# Altium PCB PCB1.PcbDoc (part 1 of 3)
Units mil, origin at the board's own origin, x right, y up, seen from the top; angles counter-clockwise.
Board outline 3930 x 3600 mil, 2 copper layers (Top Layer, Bottom Layer), stack 65.792 mil thick; 169 components, 135 nets, 555 pads, 164 vias.
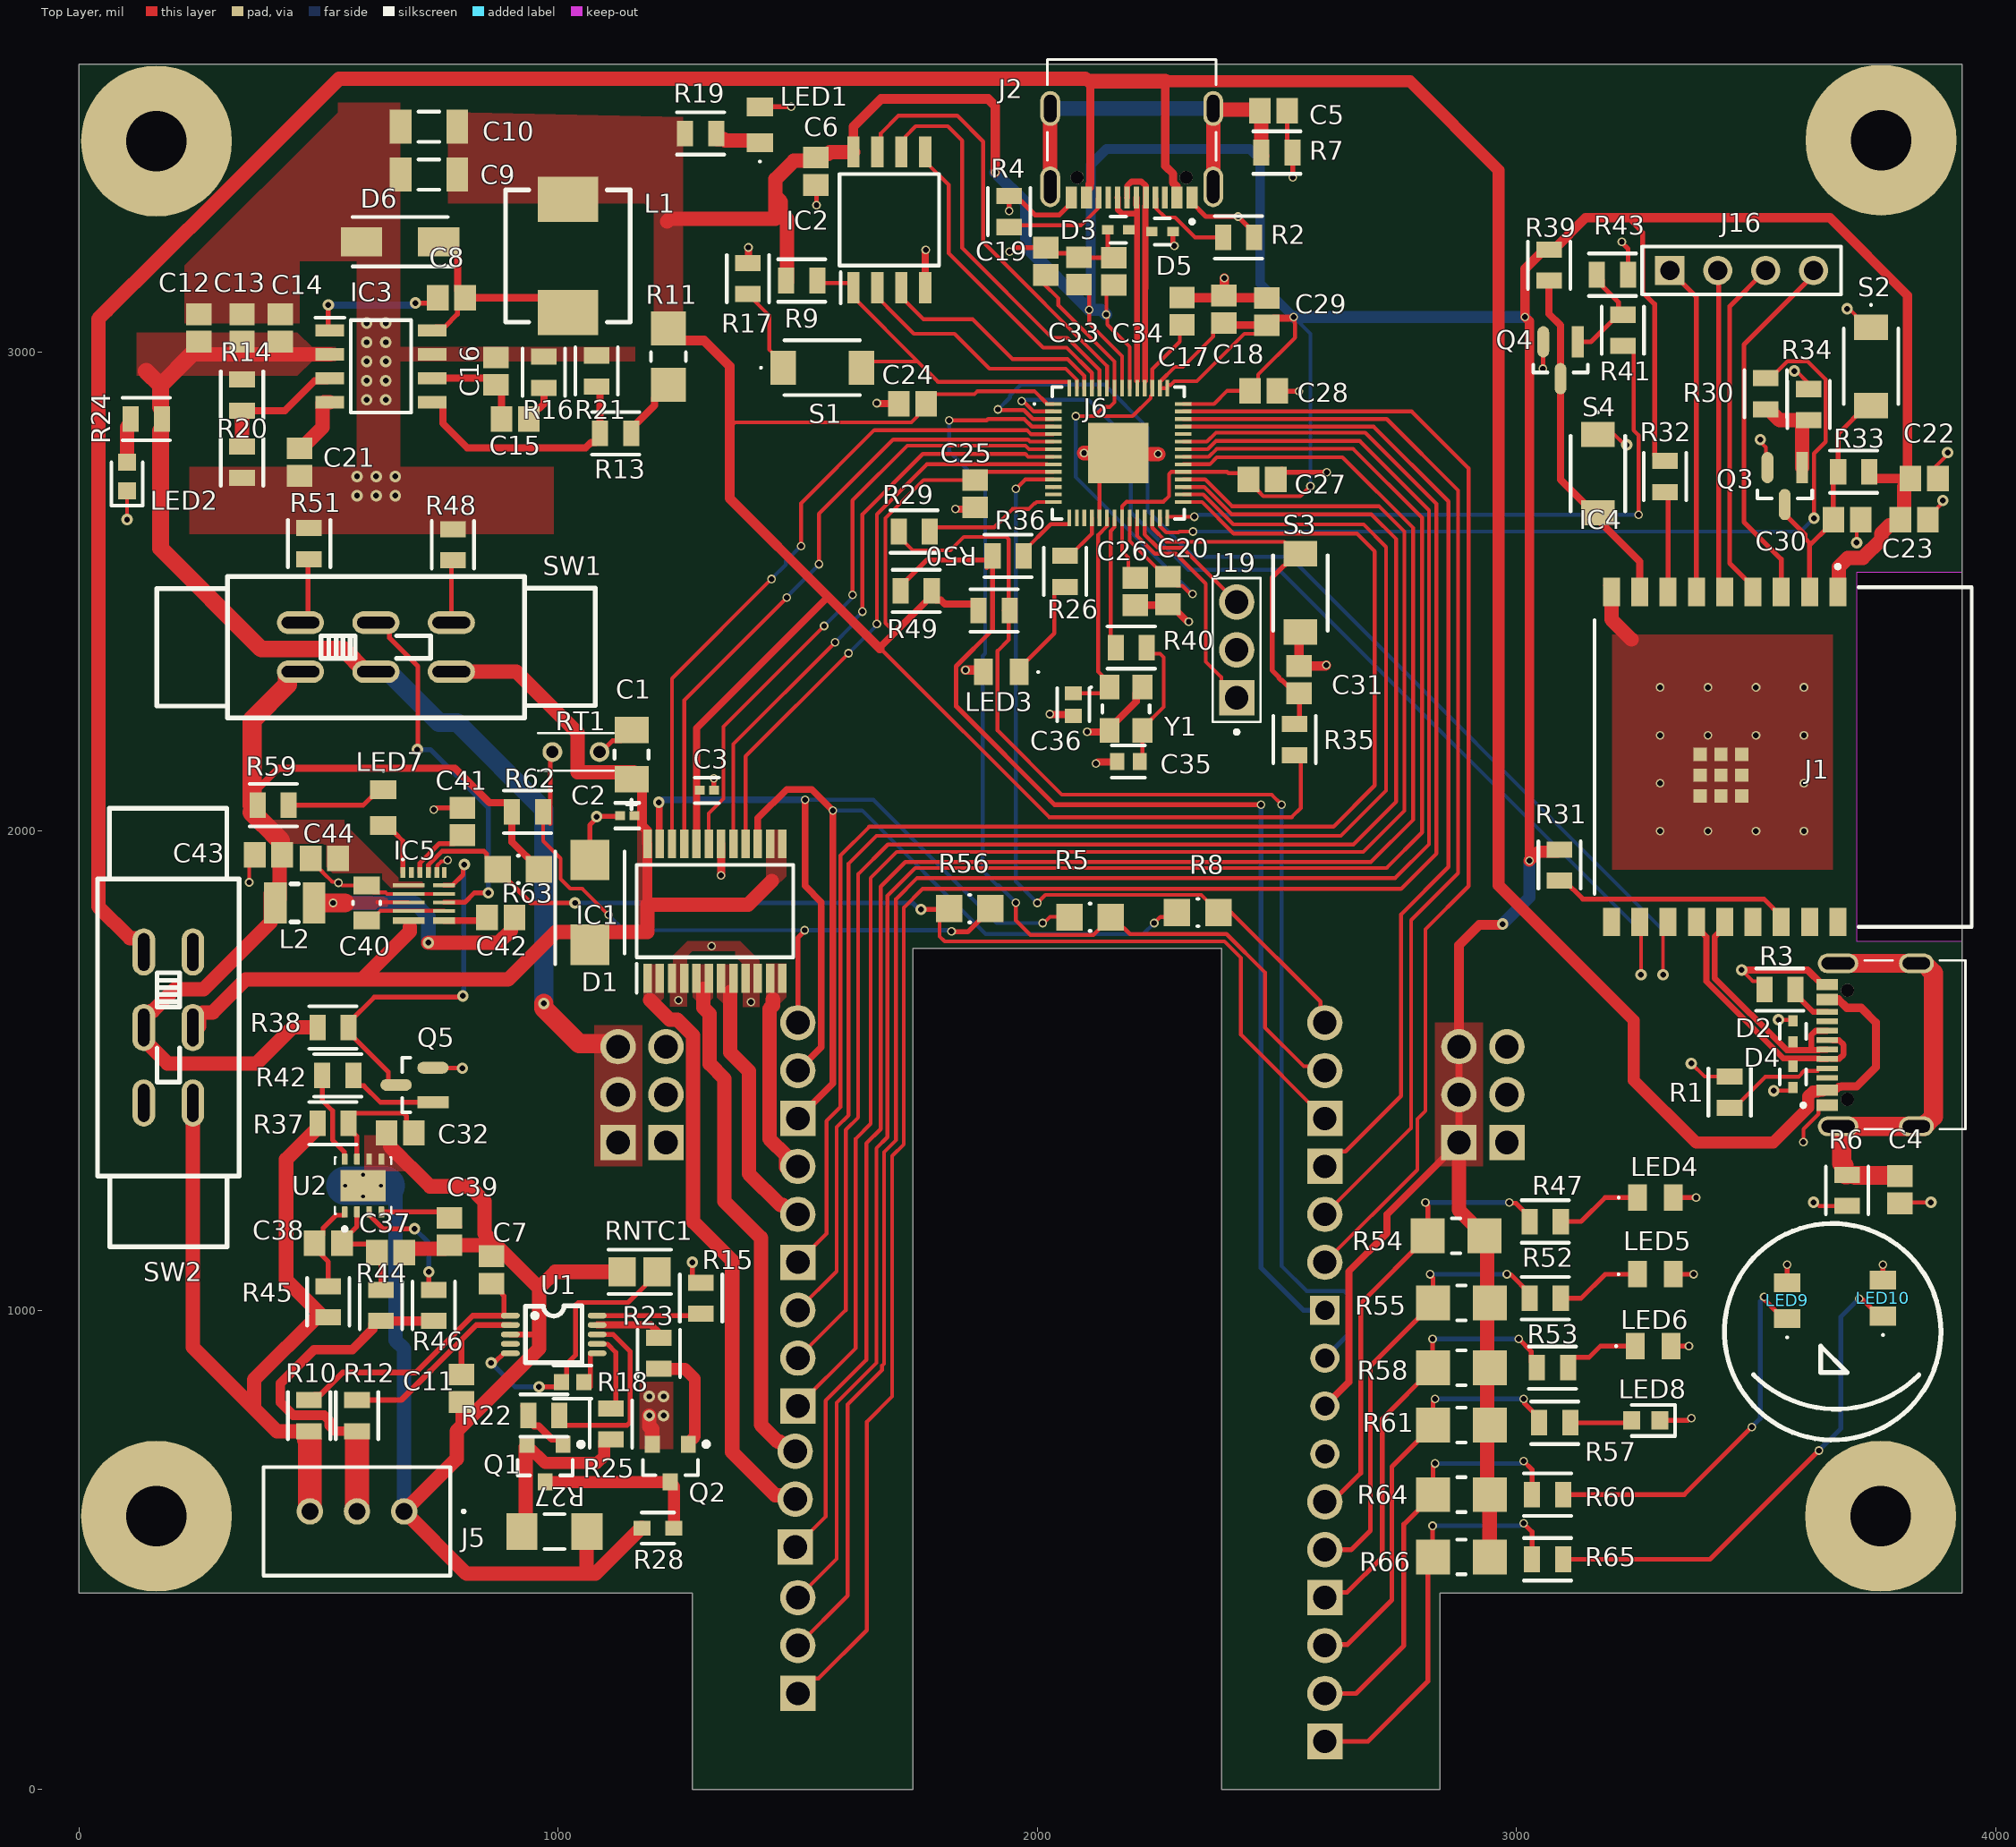
[diagram p0: Top Layer view]
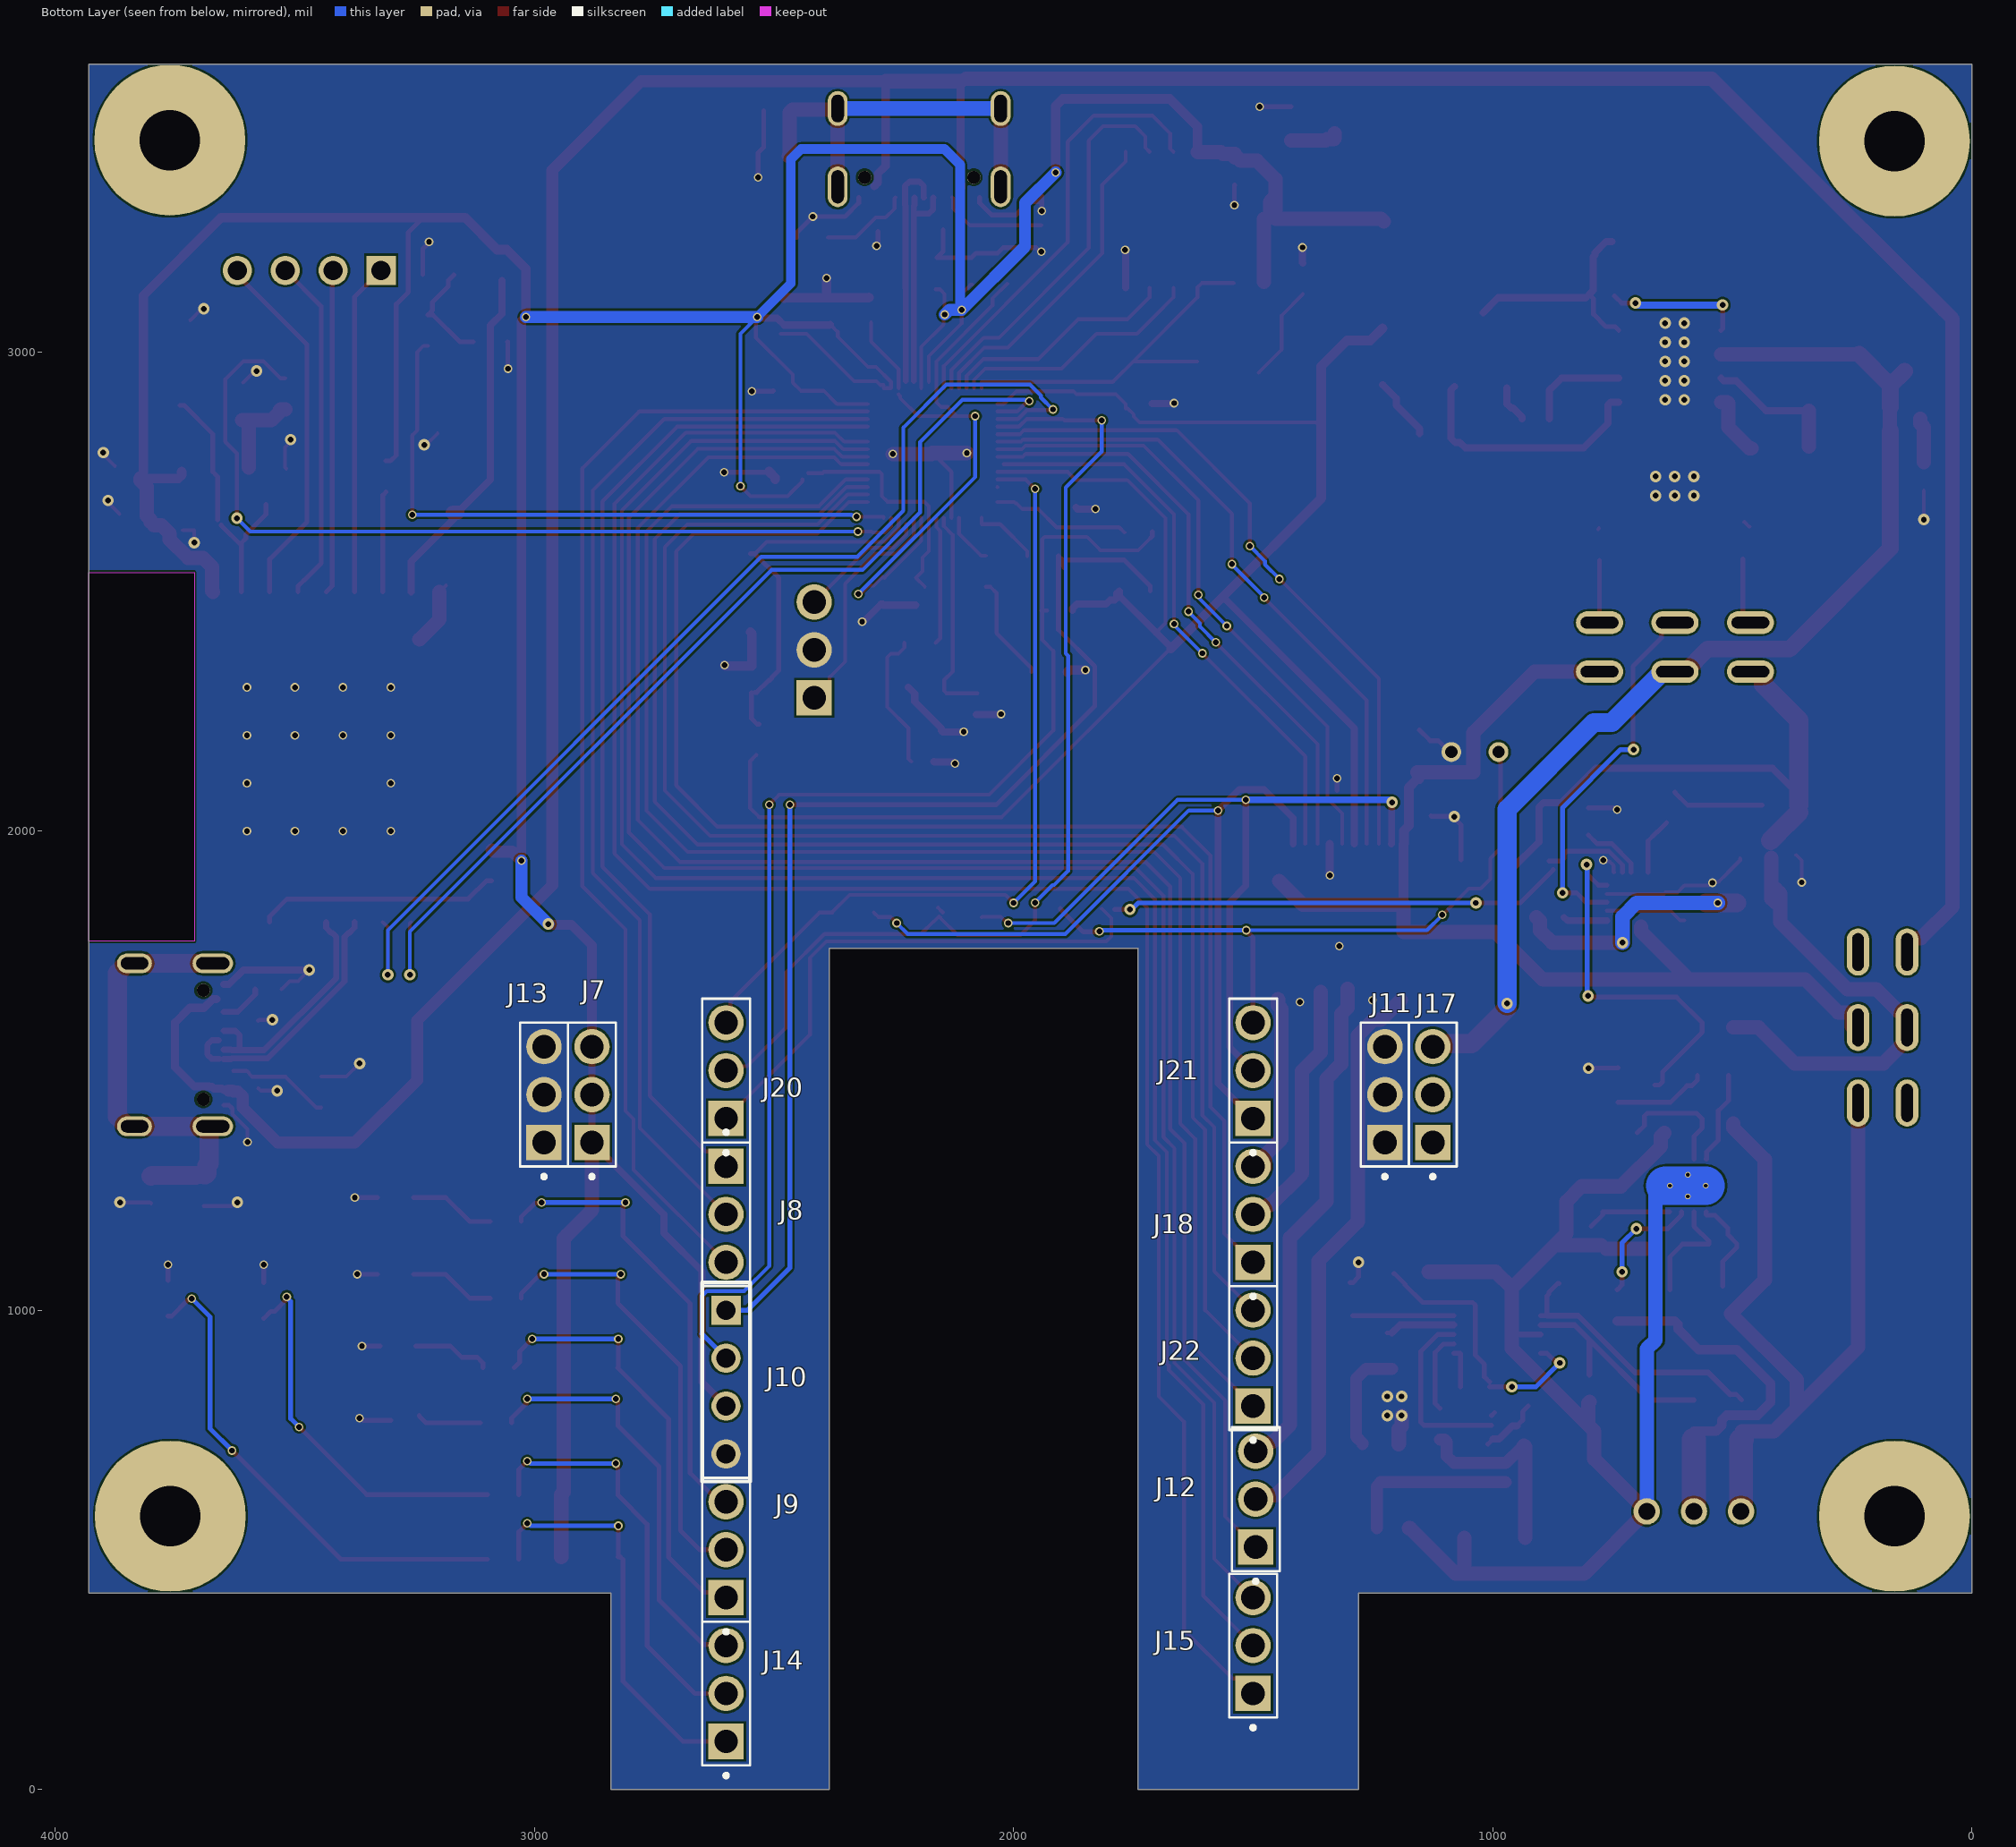
[diagram p1: Bottom Layer view, seen from below]
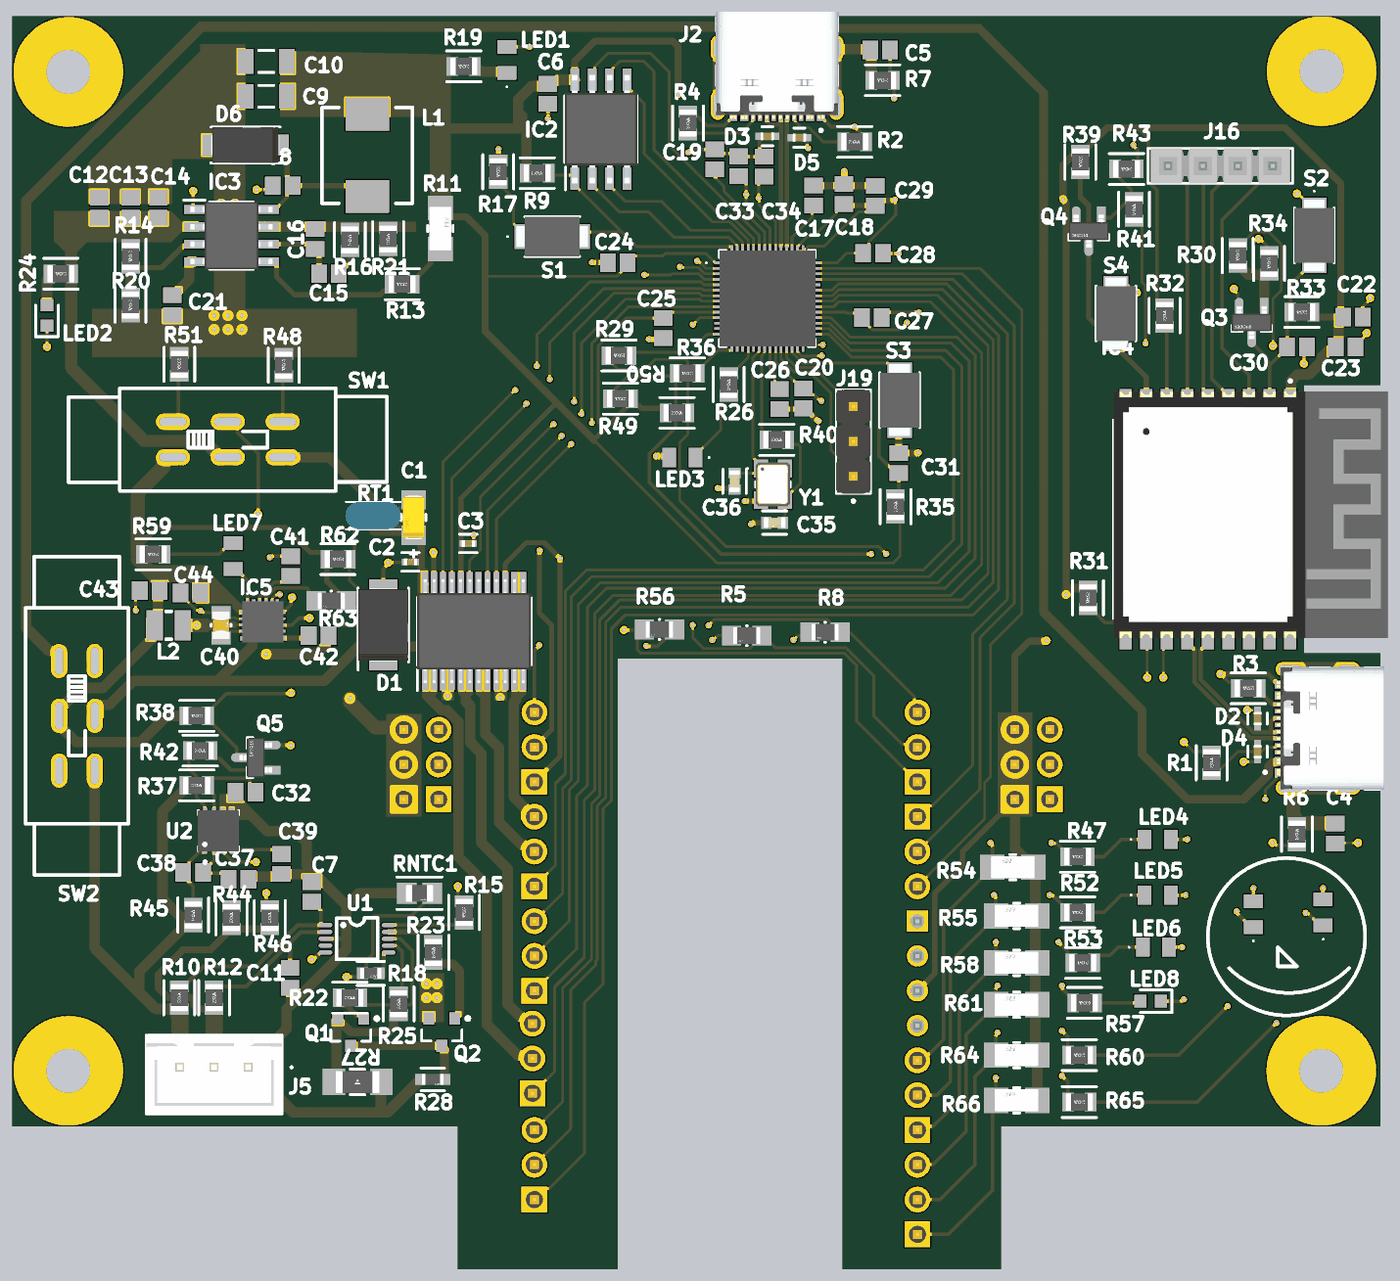
[diagram p3: 3D render of the assembled board from above, using the file's embedded part models]
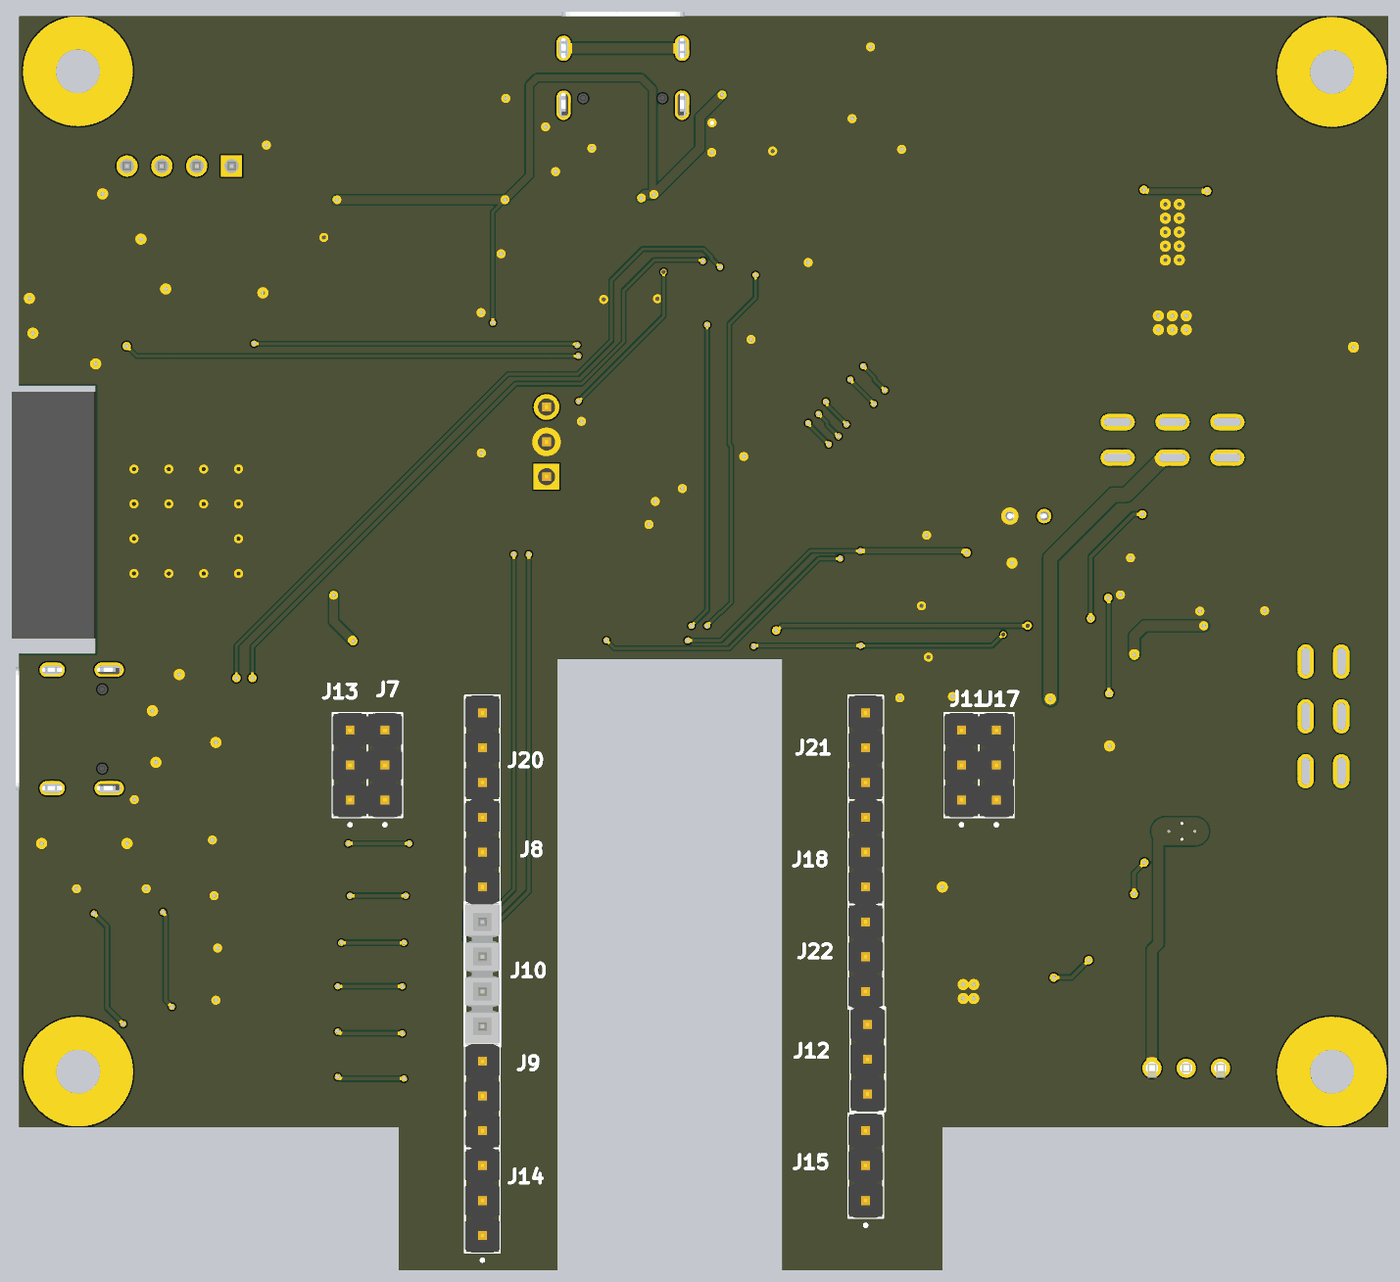
[diagram p4: 3D render of the assembled board from below, using the file's embedded part models]

## Layer stack, top to bottom
Top Solder: solder mask 0.4, Solder Resist, Dk 3.5
Top Layer: signal copper 1.4
Dielectric 1: dielectric 62.9921, FR-4, Dk 4.5
Bottom Layer: signal copper 1.4
Bottom Solder: solder mask 0.4, Solder Resist, Dk 3.5

## Board outline
1280,0 1280,410 0,410 0,3600 3930,3600 3930,410 2840,410 2840,0 2385,0 2385,1755 1740,1755 1740,0
cut-out: 3710,2540 3710,1770 3930,1770 3930,2540

## Design rules (kind name [scope] priority, off if disabled: settings)
Clearance Clearance2 [OnLayer('Power')] p1: gap=10 ignorepadtopadclearanceinfootprint=TRUE
Clearance Clearance_1 [All] p2: gap=4.5 ignorepadtopadclearanceinfootprint=TRUE
DiffPairsRouting [All] p1: maxlimit=5 minlimit=4.5 mostfreqgap=4.5 toplayer_minwidth=12.65 toplayer_maxwidth=14.97 toplayer_prefwidth=12.65 bottomlayer_minwidth=12.65 bottomlayer_maxwidth=14.97 bottomlayer_prefwidth=12.65 maxuncoupledlength=500
HoleSize [All] p1 off: absolutevalues=TRUE maxlimit=100 minlimit=1 maxpercent=80.000 minpercent=20.000
MinimumSolderMaskSliver [All] p1 off: minsoldermaskwidth=10
PolygonConnect [All] p1: connectstyle=Direct reliefconductorwidth=10 reliefentries=4 polygonreliefangle="90 Angle" airgapwidth=10
RoutingVias [All] p1: holewidth=12 width=24 viastyle="Through Hole" minholewidth=12 minwidth=18 maxholewidth=25 maxwidth=50
SilkToSilkClearance [All] p1 off: silktosilkclearance=10
SilkToSolderMaskClearance [IsPad] p1 off: minsilkscreentomaskgap=10 clearancetoexposedcopper=TRUE
SolderMaskExpansion [All] p1: expansion=4 istentingtop=FALSE
SupplyNets "Schematic Supply Nets_15" [InNet('Midtap')] p1: voltage=0.000
SupplyNets "Schematic Supply Nets_14" [InNet('Vin_Buck')] p2: voltage=0.000
SupplyNets "Schematic Supply Nets_13" [InNet('+3V3')] p3: voltage=0.000
SupplyNets "Schematic Supply Nets_12" [InNet('+5_preswitch')] p4: voltage=0.000
SupplyNets "Schematic Supply Nets_11" [InNet('+5_Charging')] p5: voltage=0.000
SupplyNets "Schematic Supply Nets_6" [InNet('Bat+_Preswitch')] p6: voltage=0.000
SupplyNets "Schematic Supply Nets_5" [InNet('Bat+')] p7: voltage=0.000
SupplyNets "Schematic Supply Nets_4" [InNet('1V1')] p8: voltage=0.000
SupplyNets "Schematic Supply Nets_3" [InNet('Bat-')] p9: voltage=0.000
SupplyNets "Schematic Supply Nets_2" [InNet('GND')] p10: voltage=0.000
Width [InNet('+3V3_RF')] p1: maxlimit=14.05 minlimit=14.05 preferedwidth=14.05 minimp=50.000000 maximp=50.000000 favimp=50.000000
Width Width_1 [InNet('NetC47_2')] p2: maxlimit=14.05 minlimit=14.05 preferedwidth=14.05 minimp=50.000000 maximp=50.000000 favimp=50.000000
Width Width2 [InNet('ANT_RF')] p3: maxlimit=14.05 minlimit=14.05 preferedwidth=14.05 minimp=50.000000 maximp=50.000000 favimp=50.000000 // NetC47_2
Width Widthall [All] p4: maxlimit=80 minlimit=4 preferedwidth=15 minimp=50.000000 maximp=50.000000 favimp=50.000000
25 further rules are at their usual default settings.

## Classes and differential pairs
differential pair class USB: ESP_USB_D RP_USB_D
differential pair RP_USB_D: +RP_USB_D_P -RP_USB_D_N
differential pair ESP_USB_D: +ESP_USB_D_P -ESP_USB_D_N

## Components (designator, comment, footprint, x,y, rotation, side; value= is the part's Value field where it differs from the comment)
C1 "10uF" FP-TAJA-MFG 1153,2159.82 r270 top
C2 "0.1uF" FP-CL779-IPC_C 1144,2032 r180 top
C3 "0.1uF" FP-CL779-IPC_C 1310.1,2085 r0 top
C4 "1nF 0805" CAPC2013X94X50LL20T25 3800,1251.46 r90 top
C5 "1nF 0805" CAPC2013X94X50LL20T25 2493,3503 r180 top
C6 "0.1uF" CAPC2013X94X50LL20T25 1538,3377 r270 top
C7 "0.1uF" CAPC2013X94X50LL20T25 861,1084 r90 top
C8 "0.1uF 0805" CAPC2013X94X50LL20T25 777,3113 r180 top
C9 "47uF 1206 (25V)" CAPC1206(3216)190_N 730,3370 r0 top value=47uF
C10 "47uF 1206 (25V)" CAPC1206(3216)190_N 730,3470 r0 top value=47uF
C11 "0.01uF" CAPC2013X94X50LL20T25 798,837 r270 top
C12 "4.7uF 0805" CAPC2013X94X50LL20T25 250,3050 r90 top
C13 "4.7uF 0805" CAPC2013X94X50LL20T25 340,3050 r90 top
C14 "0.01uF" CAPC2013X94X50LL20T25 420,3050 r90 top
C15 "1nF 0805" CAPC2013X94X50LL20T25 910,2860 r0 top
C16 "47pF 0805" CAPC2013X94X50LL20T25 870,2960 r90 top
C17 "1uF" CAPC2013X94X50LL20T25 2302,3085 r90 top
C18 "1uF" CAPC2013X94X50LL20T25 2389,3089 r90 top
C19 "0.1uF" CAPC2013X94X50LL20T25 2018,3189 r90 top
C20 "0.1uF" CAPC2013X94X50LL20T25 2273,2502 r270 top
C21 "0.01uF 0805" CAPC2013X94X50LL20T25 460,2770 r270 top
C22 "22uF" CAPC2013X94X50LL20T25 3851.04,2735.74 r0 top
C23 "0.1uF" CAPC2013X94X50LL20T25 3830,2650 r0 top
C24 "0.1uF" CAPC2013X94X50LL20T25 1739.46,2892 r180 top
C25 "0.1uF" CAPC2013X94X50LL20T25 1870,2704 r270 top
C26 "0.1uF" CAPC2013X94X50LL20T25 2204,2500 r270 top
C27 "0.1uF" CAPC2013X94X50LL20T25 2469,2734 r0 top
C28 "0.1uF" CAPC2013X94X50LL20T25 2472.54,2919 r0 top
C29 "0.1uF" CAPC2013X94X50LL20T25 2479,3084 r90 top
C30 "0.1uF 0805" CAPC2013X94X50LL20T25 3690,2650 r0 top
C31 "0.1uF" CAPC2013X94X50LL20T25 2546,2316 r90 top
C32 "0.1uF 0805" CAPC2013X94X50LL20T25 670,1370 r180 top
C33 "0.1uF" CAPC2013X94X50LL20T25 2087,3169 r90 top
C34 "0.1uF" CAPC2013X94X50LL20T25 2160,3168 r90 top
C35 "18pF 0603" FP-C0603C-CF-MFG 2190,2145 r180 top value="18 pF"
C36 "18pF 0603" FP-C0603C-CF-MFG 2075,2264 r270 top value="18 pF"
C37 "0.1uF 0805" CAPC2013X94X50LL20T25 650,1120 r180 top
C38 "0.1uF 0805" CAPC2013X94X50LL20T25 520,1140 r180 top
C39 "0.33 uF 0805" CAPC2013X94X50LL20T25 773,1164 r270 top
C40 "4.7uF 0805" FP-CC0805-0_85-MFG 600,1850 r90 top value="4.7 uF"
C41 "0.33uF 0805" CAPC2013X94X50LL20T25 800,2020 r90 top
C42 "0.1uF 0805" CAPC2013X94X50LL20T25 880,1820 r0 top
C43 "1uF" CAPC2013X94X50LL20T25 395,1950 r180 top
C44 "4.7uF 0805" CAPC2013X94X50LL20T25 512,1943 r180 top
D1 "15.4V clamp" DIOM5437X260N 1066,1851 r90 top
D2 "ESD Diode" FP-GG0402-MFG 3577,1582 r90 top value=10pF
D3 "ESD Diode" FP-GG0402-MFG 2169,3255 r180 top value=10pF
D4 "ESD Diode" FP-GG0402-MFG 3577,1486.95 r270 top value=10pF
D5 "ESD Diode" FP-GG0402-MFG 2261,3251 r0 top value=10pF
D6 "SS34A" DIOM5026X262N 670,3230 r180 top
IC1 "TB6612FNG_O,C,8,EL" SOP65P760X160-24N 1327,1833 r90 top
IC2 "SPI Flash Memory" SOIC127P790X216-8N 1691,3275.58 r90 top
IC3 "Buck converter" SOIC127P600X175-8N 630,2970 r0 top
IC4 "ESP32-C3-WROOM-02-N4" ESP32C3WROOM02N4 3426.69,2116.69 r270 top
IC5 "Battery Charger" SY6982CQDC 720,1860 r0 top
J1 "USB-C" KINGHELM_KH-TYPE-C-16P 3834.7,1553.78 r90 top
J2 "USB-C" KINGHELM_KH-TYPE-C-16P 2197,3508 r180 top
J5 "JST-XH 2.5mm 3P" B3BXHALFSN 678.43,580 r180 top
J6 "RP2040" SC091413 2169,2789 r0 top
J7 "3V3" WURTH_61300311121 2880,1450 r90 bottom
J8 "ADC" WURTH_61300311121 2600,1200 r270 bottom
J9 "Connect 3V3" WURTH_61300311121 2600,500 r90 bottom
J10 "I2C" SMTC-TSW-104-08-X-S 2600,1000 r270 bottom
J11 "GND" WURTH_61300311121 1225,1450 r90 bottom
J12 "61300311121" WURTH_61300311121 1494.47,605.53 r90 bottom
J13 "GND" WURTH_61300311121 2980,1450 r90 bottom
J14 "Connect 3V3" WURTH_61300311121 2600,200 r90 bottom
J15 "61300311121" WURTH_61300311121 1500,300 r90 bottom
J16 "DNP_JTAG" SMTC-TSW-104-08-X-S 3320,3170 r0 top
J17 "Vin (5V or 7.4V)" WURTH_61300311121 1125,1450 r90 bottom
J18 "61300311121" WURTH_61300311121 1500,1200 r90 bottom
J19 "Debug RP2040" WURTH_61300311121 2416,2378 r90 top
J20 "61300311121" WURTH_61300311121 2600,1500 r90 bottom
J21 "61300311121" WURTH_61300311121 1500,1500 r90 bottom
J22 "61300311121" WURTH_61300311121 1500,900 r90 bottom
L1 "6.8uH" IND-SMD_L7.0-W6.6 1020,3200 r90 top
L2 "0.68uH" IND-SMD_L2.5-W2.0 450,1850 r0 top value=680nH
LED1 "Yellow" KT0805G 1421,3474 r0 top
LED2 "Red" LEDC1608X70N 100,2740 r90 top
LED3 "Green" KT0805G 1925,2332 r90 top
LED4 "White" KT0805G 3290,1235 r270 top
LED5 "Green" KT0805G 3290,1075 r270 top
LED6 "Yellow" KT0805G 3285,925 r270 top
LED7 "Charging" KT0805G 635,2049 r180 top
LED8 "Red" LEDC1608X70N 3270,770 r180 top
LED9 "Green" KT0805G 3565,1020 r0 top
LED10 "Green" KT0805G 3765,1025 r0 top
Q1 "Discharge Protection" ONSC-SOT-23-3-318-08_V 972.6,680.63 r270 top
Q2 "Charge Protection" ONSC-SOT-23-3-318-08_V 1234,681 r270 top
Q3 "MMBT3904-7-F" FP-SOT23-IPC_A 3560,2720 r270 top
Q4 "MMBT3904-7-F" FP-SOT23-IPC_A 3091.98,2982.55 r270 top
Q5 "MMBT3904-7-F" FP-SOT23-IPC_A 700,1470 r180 top
R1 "5.1k 0805" FP-RN73R2A-IPC_C 3445,1455 r90 top
R2 "5.1k 0805" FP-RN73R2A-IPC_C 2420,3239 r0 top
R3 "5.1k 0805" FP-RN73R2A-IPC_C 3550,1669 r180 top
R4 "5.1k 0805" FP-RN73R2A-IPC_C 1941,3293 r90 top
R5 "0ohm 0805" FP-HCJ0805-MFG 2110,1820 r180 top
R6 "1M 0805" FP-RN73R2A-IPC_C 3690,1250 r90 top
R7 "1M 0805" FP-RN73R2A-IPC_C 2500,3416 r180 top
R8 "0ohm 0805" FP-HCJ0805-MFG 2335,1830 r180 top
R9 "10k" FP-RN73R2A-IPC_C 1508,3149 r0 top
R10 "1k 0805" FP-RN73R2A-IPC_C 480,780 r90 top
R11 "0ohm 1206" FP-HCJ1206-MFG 1230,2990 r270 top
R12 "1k 0805" FP-RN73R2A-IPC_C 580,780 r90 top
R13 "10k 0805" FP-RN73R2A-IPC_C 1120,2830 r180 top
R14 "330K 0805" FP-RN73R2A-IPC_C 340,2910 r270 top
R15 "200k" FP-RN73R2A-IPC_C 1298,1025 r270 top
R16 "30K 0805" FP-RN73R2A-IPC_C 970,2957.5 r90 top
R17 "1k 0805" FP-RN73R2A-IPC_C 1396,3153 r270 top
R18 "110K 0603" FP-RMCF0603-IPC_C 1030,850 r0 top
R19 "330 0805" FP-RN73R2A-IPC_C 1297,3456 r180 top
R20 "68K 0805" FP-RN73R2A-IPC_C 340,2770 r270 top
R21 "3.3k 0805" FP-RN73R2A-IPC_C 1080,2960 r90 top
R22 "10k" FP-RN73R2A-IPC_C 970,780 r0 top
R23 "10k" FP-RN73R2A-IPC_C 1210,910 r90 top
R24 "1k 0805" FP-RN73R2A-IPC_C 140,2860 r180 top
R25 "2k" FP-RN73R2A-IPC_C 1110,762.5 r90 top
R26 "330 0805" FP-RN73R2A-IPC_C 2058,2542 r90 top
R27 "40mOhms 1206" FP-WSL1206-0_508-MFG 992,538 r180 top
R28 "3MOhms 0603" FP-AC0603-MFG 1208,545 r0 top
R29 "33 0805" FP-RN73R2A-IPC_C 1743,2625 r180 top
R30 "10k 0805" FP-RN73R2A-IPC_C 3520,2912.5 r270 top
R31 "10k" FP-RN73R2A-IPC_C 3090,1929 r270 top
R32 "10k" FP-RN73R2A-IPC_C 3310,2740 r90 top
R33 "10k" FP-RN73R2A-IPC_C 3703.95,2750 r180 top
R34 "100k 0805" FP-RN73R2A-IPC_C 3610,2890 r270 top
R35 "10k 0805" FP-RN73R2A-IPC_C 2537,2191 r90 top
R36 "33 0805" FP-RN73R2A-IPC_C 1939,2574 r180 top
R37 "100 0805" FP-RN73R2A-IPC_C 530,1390 r0 top
R38 "100k 0805" FP-RN73R2A-IPC_C 530,1590 r180 top
R39 "10k" FP-RN73R2A-IPC_C 3068,3181 r270 top
R40 "1k" FP-RN73R2A-IPC_C 2196,2383 r0 top
R41 "10k 0805" FP-RN73R2A-IPC_C 3222,3045 r90 top
R42 "470K 0805" FP-RN73R2A-IPC_C 540,1490 r0 top
R43 "100k 0805" FP-RN73R2A-IPC_C 3200.5,3161 r180 top
R44 "270 0805" FP-RN73R2A-IPC_C 630,1010 r90 top
R45 "150 0805" FP-RN73R2A-IPC_C 520,1017.5 r90 top
R46 "120 0805 (5% or better)" FP-RN73R2A-IPC_C 740,1010 r90 top
R47 "330 0805" FP-RN73R2A-IPC_C 3060,1185 r180 top
R48 "10k 0805" FP-RN73R2A-IPC_C 780,2597.5 r270 top
R49 "4.7k" FP-RN73R2A-IPC_C 1747,2501 r180 top
R50 "4.7k" FP-RN73R2A-IPC_C 1909.67,2460.33 r0 top
R51 "20k 0805" FP-RN73R2A-IPC_C 480,2600 r270 top
R52 "330 0805" FP-RN73R2A-IPC_C 3060,1025 r180 top
R53 "330 0805" FP-RN73R2A-IPC_C 3075,880 r180 top
R54 "0ohm" FP-HCJ1206-MFG 2874.06,1155 r0 top
R55 "0ohm" FP-HCJ1206-MFG 2885,1015 r0 top
R56 "0ohm 0805" FP-HCJ0805-MFG 1859,1838 r180 top
R57 "330 0805" FP-RN73R2A-IPC_C 3080,765 r180 top
R58 "0ohm" FP-HCJ1206-MFG 2885,880 r0 top
R59 "1k 0805" FP-RN73R2A-IPC_C 405,2054 r180 top
R60 "330 0805" FP-RN73R2A-IPC_C 3065,615 r180 top
R61 "0ohm" FP-HCJ1206-MFG 2885,760 r0 top
R62 "10k 0805" FP-RN73R2A-IPC_C 936,2040 r180 top
R63 "0ohm 0805" FP-HCJ0805-MFG 916.69,1920 r180 top
R64 "0ohm" FP-HCJ1206-MFG 2885,615 r0 top
R65 "330 0805" FP-RN73R2A-IPC_C 3065,480 r180 top
R66 "0ohm" FP-HCJ1206-MFG 2885,485 r0 top
RNTC1 "100KOHM 0805" FP-NCP21-0_2-IPC_A 1170,1080 r0 top
RT1 "NXRT15XH103FA1B030" THERM_NXRT15XH103FA1B030 1037,2165 r180 top
S1 "RP_Boot_Select" TS1088AR02016 1551,2967 r0 top
S2 "ESP_Reset" TS1088AR02016 3740,2970 r270 top
S3 "RP_Reset" TS1088AR02016 2549,2497 r270 top
S4 "ESP_Boot_select" TS1088AR02016 3170,2746 r270 top
SW1 "DPDT Switch (fast charging siwtch, select for )" "PCBComponent_1 - duplicate" 629.48,2387.64 r0 top
SW2 "DPDT Switch (fast charging siwtch, select for )" "PCBComponent_1 - duplicate" 190,1580 r270 top
U1 "BMS" "MSOP-10_L3.0-W3.0-P0.50-LS4.9-BL - duplicate" 990.55,949.37 r270 top
U2 "Cell balancing" SON65P300X300X100-9N 592.6,1260 r90 top
Y1 "12Mhz Crystal" ABM8272T3 2185,2255 r270 top

## Footprints (in the part's own frame and the unit in brackets; to place one, negate y for a bottom-side part, rotate by r counter-clockwise, add the part's x,y. Pads: shape width x height; smd on the part's side, far side on the other; paste and mask are expansions set on the pad)
ABM8272T3 [mm]
  rect 1.3x1.05 smd: 1(-1.15,-0.875) 2(1.15,-0.875) 3(1.15,0.875) 4(-1.15,0.875)
  silkscreen extent -1.2,-1.9 0.2,1.25, body extent -1.6,-1.25 1.6,1.25, height 0.75
B3BXHALFSN [mm]
  round 1.4 hole 0.9: 1(0,0) 2(2.5,0) 3(5,0)
  silkscreen extent -3.2,-2.35 7.45,3.4, body extent -2.45,-2.35 7.45,3.4, height 7.09
CAPC1206(3216)190_N [mm] "Chip Capacitor, Body 3.2x1.6mm, Height 1.9mm, IPC Medium Density"
  rect 1.15x1.8 smd: 1(-1.5,0) 2(1.5,0)
  silkscreen extent -0.55,-0.8 0.55,0.8, body extent -1.7,-0.9 1.7,0.9, height 1.9
CAPC2013X94X50LL20T25 [mm] "Chip Capacitor, 2-Leads, Body 2.01x1.25mm, IPC High Density"
  rect 1.15x1.35 smd: 1(-0.725,0) 2(0.725,0)
  body extent -1.1,-0.72 1.1,0.72, height 0.94
DIOM5026X262N [mm]
  rect 2.2x1.55 smd: 1(-2.05,0) 2(2.05,0)
  silkscreen extent -2.83,-1.31 2.52,1.31, body extent -2.52,-1.31 2.52,1.31, height 2.62
DIOM5437X260N [mm]
  rect 2.15x2.05 smd: 1(-2.25,0) 2(2.25,0)
  silkscreen extent -3.27,-1.84 2.7,1.84, body extent -2.7,-1.84 2.7,1.84, height 2.6
ESP32C3WROOM02N4 [mm]
  rect 1.5x0.9 smd: 1(-9.71,6.2) 2(-9.71,4.7) 3(-9.71,3.2) 4(-9.71,1.7) 5(-9.71,0.2) 6(-9.71,-1.3) 7(-9.71,-2.8) 8(-9.71,-4.3) 9(-9.71,-5.8) 10(7.79,-5.8) 11(7.79,-4.3) 12(7.79,-2.8) 13(7.79,-1.3) 14(7.79,0.2) 15(7.79,1.7) 16(7.79,3.2) 17(7.79,4.7) 18(7.79,6.2)
  rect 0.7x0.7 smd: 19(0,0) 20(1.1,0) 21(1.1,1.1) 22(0,1.1) 23(-1.1,1.1) 24(-1.1,0) 25(-1.1,-1.1) 26(0,-1.1) 27(1.1,-1.1)
  silkscreen extent -11.16,-6.7 8.04,13.3, body extent -10.31,-6.7 7.69,13.3, height 3.2
FP-AC0603-MFG [mm]
  rect 0.9x0.8 smd paste+0 mask+0: 1(-0.85,0) 2(0.85,0)
  silkscreen extent -0.85,-0.82 0.85,0.82, body extent -1.4,-0.55 1.4,0.55, height 0.25
FP-C0603C-CF-MFG [mm]
  rect 0.75x0.9 smd paste+0 mask+0: 1(-0.6,0) 2(0.6,0)
  silkscreen extent -0.87,-0.85 0.88,0.85, body extent -1.2,-0.6 1.2,0.6, height 0.25
FP-CC0805-0_85-MFG [mm]
  rect 0.95x1.4 smd paste+0 mask+0: 1(-0.925,0) 2(0.925,0)
  silkscreen extent -0.08,-0.72 0.08,0.72, body extent -1.6,-1.05 1.6,1.05, height 0.25
FP-CL779-IPC_C [mil]
  rect 20.29x18.6 smd paste+0 mask+0: 1(-14.9,0) 2(14.9,0)
  silkscreen extent -25,-27 25,27, body extent -29,-15 29,15, height 10
FP-GG0402-MFG [mm]
  rect 0.61x0.51 smd paste+0 mask+0: 1(-0.56,0) 2(0.56,0)
  silkscreen extent -0.4,-0.7 0.4,0.7, body extent -0.96,-0.43 0.96,0.43, height 0.25
FP-HCJ0805-MFG [mm]
  rect 1.4x1.44 smd paste+0 mask+0: 1(-1.1,0) 2(1.1,0)
  silkscreen extent -0.03,-0.72 0.03,0.72, body extent -1.9,-0.82 1.9,0.82, height 0.25
FP-HCJ1206-MFG [mm]
  rect 1.8x1.84 smd paste+0 mask+0: 1(-1.5,0) 2(1.5,0)
  silkscreen extent -0.23,-0.92 0.23,0.92, body extent -2.5,-1.02 2.5,1.02, height 0.25
FP-NCP21-0_2-IPC_A [mil]
  rect 57.27x61.27 smd paste+0 mask+0: 1(-36.45,0) 2(36.45,0)
  silkscreen extent -65,-46 65,46, body extent -85,-50 85,50, height 10
FP-RMCF0603-IPC_C [mil]
  rect 31.73x33.79 smd paste+0 mask+0: 1(-23.66,0) 2(23.66,0)
  silkscreen extent -40,-34 40,34, body extent -43,-23 43,23, height 10
FP-RN73R2A-IPC_C [mil]
  rect 33.67x53.39 smd paste+0 mask+0: 1(-32.5,0) 2(32.5,0)
  silkscreen extent -49,-44 49,44, body extent -53,-32 53,32, height 10
FP-SOT23-IPC_A [mm]
  rect 1.659x0.627 smd paste+0 mask+0: 1(-0.977,0.915)
  rrect100% 1.659x0.627 smd paste+0 mask+0: 2(-0.977,-0.915) 3(0.977,0)
  silkscreen extent 0.23,-1.45 0.65,1.45, body extent -2.31,-1.95 2.31,1.95, height 0.25
FP-TAJA-MFG [mm]
  rect 1.4x1.8 smd paste+0 mask+0: 1(-1.3,0) 2(1.3,0)
  silkscreen extent -0.23,-0.9 2.9,0.9, body extent -2.1,-1 2.1,1, height 0.25
FP-WSL1206-0_508-MFG [mm]
  rect 1.65x1.93 smd paste+0 mask+0: 1(-1.725,0) 2(1.725,0)
  silkscreen extent -0.53,-0.93 0.53,0.93, body extent -2.65,-1.06 2.65,1.06, height 0.25
IND-SMD_L2.5-W2.0 [mm]
  rect 1.2x2.2 smd: 1(1.028,0) 2(-1.028,0)
  silkscreen extent -0.2,-1.02 0.2,1.02
IND-SMD_L7.0-W6.6 [mm]
  rect 2.4x3.2 smd: 1(-3,0) 2(3,0)
  silkscreen extent -3.5,-3.3 3.5,3.3
KINGHELM_KH-TYPE-C-16P [mm]
  rect 0.6x1.15 smd: A1_B12(-3.2,4.725) A4_B9(-2.4,4.725) A9_B4(2.4,4.725) A12_B1(3.2,4.725)
  rect 0.3x1.15 smd: A5(-1.25,4.725) A6(-0.25,4.725) A7(0.25,4.725) A8(1.25,4.725) B5(1.75,4.725) B6(0.75,4.725) B7(-0.75,4.725) B8(-1.75,4.725)
  oval 1.05x1.85 hole 0.65 slot 1.45 at 90 deg: SH1(-4.32,0) SH2(4.32,0)
  oval 1.05x2.15 hole 0.65 slot 1.75 at 90 deg: SH3(-4.32,4.15) SH4(4.32,4.15)
  round 0.7 hole 0.7 unplated: ""(-2.89,3.65) ""(2.89,3.65)
  silkscreen extent -4.47,-2.6 4.47,6.1, body extent -4.47,-2.67 4.47,5.14, height 3.41
KT0805G [mm]
  rect 1.4x1 smd: 1(0,-0.95) 2(0,0.95)
  silkscreen extent -0.05,-2 0.05,-1.9
LEDC1608X70N [mm]
  rect 0.9x0.95 smd: 1(-0.75,0) 2(0.75,0)
  silkscreen extent -1.55,-0.82 0.75,0.82
"MSOP-10_L3.0-W3.0-P0.50-LS4.9-BL - duplicate" [mm]
  oval 0.3x1 smd: 1(-1,-2.3) 2(-0.5,-2.3) 3(0,-2.3) 4(0.5,-2.3) 5(1,-2.3) 6(1,2.3) 7(0.5,2.3) 8(0,2.3) 9(-0.5,2.3) 10(-1,2.3)
  silkscreen extent -1.52,-1.5 1.5,1.5
ONSC-SOT-23-3-318-08_V [mm] "SOT23, 3-Leads, Body 2.92x1.3mm, Pitch 0.95mm"
  rect 0.9x0.8 smd: 1(-1,0.95) 2(-1,-0.95) 3(1,0)
  silkscreen extent -1.12,-1.46 0.65,2.03, body extent -0.65,-1.46 0.65,1.46, height 1.11
"PCBComponent_1 - duplicate" [mm]
  oval 2.5x1.2 hole 0.6 slot 2 at 0 deg paste-2539.97 mask+0.05: 1(-4.254,1.203) 2(-0.254,1.203) 3(3.746,1.203) 4(-4.254,-1.397) 5(-0.254,-1.397) 6(3.746,-1.397)
  silkscreen extent -11.87,-3.85 11.37,3.65
SC091413 [mm]
  rect 0.875x0.2 smd: 1(-3.438,2.6) 2(-3.438,2.2) 3(-3.438,1.8) 4(-3.438,1.4) 5(-3.438,1) 6(-3.438,0.6) 7(-3.438,0.2) 8(-3.438,-0.2) 9(-3.438,-0.6) 10(-3.438,-1) 11(-3.438,-1.4) 12(-3.438,-1.8) 13(-3.438,-2.2) 14(-3.438,-2.6) 29(3.438,-2.6) 30(3.438,-2.2) 31(3.438,-1.8) 32(3.438,-1.4) 33(3.438,-1) 34(3.438,-0.6) 35(3.438,-0.2) 36(3.438,0.2) 37(3.438,0.6) 38(3.438,1) 39(3.438,1.4) 40(3.438,1.8) 41(3.438,2.2) 42(3.438,2.6)
  rect 0.2x0.875 smd: 15(-2.6,-3.438) 16(-2.2,-3.438) 17(-1.8,-3.438) 18(-1.4,-3.438) 19(-1,-3.438) 20(-0.6,-3.438) 21(-0.2,-3.438) 22(0.2,-3.438) 23(0.6,-3.438) 24(1,-3.438) 25(1.4,-3.438) 26(1.8,-3.438) 27(2.2,-3.438) 28(2.6,-3.438) 43(2.6,3.438) 44(2.2,3.438) 45(1.8,3.438) 46(1.4,3.438) 47(1,3.438) 48(0.6,3.438) 49(0.2,3.438) 50(-0.2,3.438) 51(-0.6,3.438) 52(-1,3.438) 53(-1.4,3.438) 54(-1.8,3.438) 55(-2.2,3.438) 56(-2.6,3.438)
  rect 3.2x3.2 smd: 57(0,0)
  silkscreen extent -4.5,-3.5 3.5,3.5, body extent -3.5,-3.5 3.5,3.5, height 0.92
SMTC-TSW-104-08-X-S [mm] ".025 SQ Post Terminal Strip Assembly, 1x4 Pins, Vertical, 2.54mm Pitch, Male"
  rect 1.55x1.55 hole 1.02: 1(0,0)
  round 1.55 hole 1.02: 2(2.54,0) 3(5.08,0) 4(7.62,0)
  silkscreen extent -1.46,-1.27 9.08,1.27, body extent -1.27,-1.27 8.89,1.27, height 8.38
SOIC127P600X175-8N [mm]
  rect 1.525x0.65 smd: 1(-2.712,1.905) 2(-2.712,0.635) 3(-2.712,-0.635) 4(-2.712,-1.905) 5(2.712,-1.905) 6(2.712,-0.635) 7(2.712,0.635) 8(2.712,1.905)
  silkscreen extent -3.47,-2.45 1.6,2.58, body extent -3,-2.45 3,2.45, height 1.75
SOIC127P790X216-8N [mm]
  rect 1.65x0.65 smd: 1(-3.6,1.905) 2(-3.6,0.635) 3(-3.6,-0.635) 4(-3.6,-1.905) 5(3.6,-1.905) 6(3.6,-0.635) 7(3.6,0.635) 8(3.6,1.905)
  silkscreen extent -4.43,-2.64 2.42,2.64, body extent -3.95,-2.64 3.95,2.64, height 2.16
SON65P300X300X100-9N [mm]
  rrect25% 0.6x0.3 smd mask+0: 1(-1.4,0.975) 2(-1.4,0.325) 3(-1.4,-0.325) 4(-1.4,-0.975) 5(1.4,-0.975) 6(1.4,-0.325) 7(1.4,0.325) 8(1.4,0.975)
  rect 1.65x2.4 smd paste-2 mask+0.07: 9(0,0)
  round 0.3 hole 0.2 mask+0: 10(0,0.95) 11(-0.575,0) 12(0.575,0) 13(0,-0.95)
  silkscreen extent -2.4,-1.5 1.5,1.5, body extent -1.5,-1.5 1.5,1.5, height 1
SOP65P760X160-24N [mm]
  rect 1.525x0.45 smd: 1(-3.562,3.575) 2(-3.562,2.925) 3(-3.562,2.275) 4(-3.562,1.625) 5(-3.562,0.975) 6(-3.562,0.325) 7(-3.562,-0.325) 8(-3.562,-0.975) 9(-3.562,-1.625) 10(-3.562,-2.275) 11(-3.562,-2.925) 12(-3.562,-3.575) 13(3.562,-3.575) 14(3.562,-2.925) 15(3.562,-2.275) 16(3.562,-1.625) 17(3.562,-0.975) 18(3.562,-0.325) 19(3.562,0.325) 20(3.562,0.975) 21(3.562,1.625) 22(3.562,2.275) 23(3.562,2.925) 24(3.562,3.575)
  silkscreen extent -4.33,-4.15 2.45,4.15, body extent -3.8,-4.15 3.8,4.15, height 1.6
SY6982CQDC [mm]
  rect 0.25x0.575 smd: 1(-1.125,1.363) 2(-0.675,1.363) 3(-0.225,1.363) 4(0.225,1.363) 5(0.675,1.363) 6(1.065,1.363)
  rect 1.17x0.225 smd: 7(1.065,0.688)
  rect 1.17x0.2 smd: 8(1.065,0.225) 9(1.065,-0.225) 10(1.065,-0.675)
  rect 1.17x0.35 smd: 11(1.065,-1.2)
  rect 1.68x0.35 smd: 12(-0.81,-1.2)
  rect 1.68x0.2 smd: 13(-0.81,-0.675) 14(-0.81,-0.225) 15(-0.81,0.225)
  rect 1.68x0.225 smd: 16(-0.81,0.688)
  silkscreen extent -1.17,2 -1.08,2.1, body extent -1.5,-1.5 1.5,1.5, height 1
THERM_NXRT15XH103FA1B030 [mm]
  round 1.05 hole 0.65: 1(-1.25,0) 2(1.25,0)
  silkscreen extent -2,-1 2,1, body extent -2,-1 2,1, height 7.49
TS1088AR02016 [mm]
  rect 1.35x1.8 smd: 1(-2.075,0) 2(2.075,0)
  silkscreen extent -3.3,-1.45 2,1.45, body extent -2.62,-1.45 2.62,1.45, height 2.1
WURTH_61300311121 [mm]
  rect 1.875x1.875 / inner round 1.875 / far side rect 1.875x1.875 hole 1.25: 1(-2.54,0)
  round 1.875 hole 1.25: 2(0,0) 3(2.54,0)
  silkscreen extent -4.45,-1.27 3.81,1.27, body extent -3.81,-1.27 3.81,1.27, height 7.27

## Part data
C1: library part CMP-1661-00004-2, "C7171", Case Code (Imperial)=1206, Case Code (Metric)=3216, Dielectric Material=Tantalum, ESR (Equivalent Series Resistance)=3R, Leakage Current=1.6uA, Max Operating Temperature=125°C, Min Operating Temperature=-55°C, Package Quantity=1, Tolerance=10%, Voltage=16V, Capacitance=10uF, Case/Package=1206, Depth=1.6mm, Dissipation Factor=8%, Features="General Purpose", Height=1.6mm, Height - Seated (Max)=0.071inch, LCSC=C7171, Lead Free="Lead Free", Lead Pitch=1.1mm, Length=3.2mm, Mount="Surface Mount", Number of Pins=2, Packaging="Tape and Reel", Polarity=Polar, Radiation Hardening=No, REACH SVHC="No SVHC", Termination=SMD/SMT, Voltage Rating=16V, Voltage Rating (DC)=16V, Width=1.6mm
C2 C3: library part CMP-13271-002336-1, "C307331", LCSC=C307331
C4 C5 C15: library part CMP-2007-04160-1, "C46653", Manufacturer="AVX Interconnect / Elco", Part Number=08051C102KAT4A
C6 C7 C8 C19 C20 C23 C24 C25 C26 C27 C28 C29 C30 C31 C32 C33 C34 C37 C38 C42: library part CMP-2007-04160-1, "C28233", Manufacturer="AVX Interconnect / Elco", Part Number=08051C102KAT4A
C9 C10: library part CMP-1037-05002-1, "C6119973", Case-EIA=1206, Case-Metric=3216, Rated Voltage="10 V", Tolerance=Â±20%, Max Thickness="1.9 mm", Technology=SMT
C11 C14 C21: library part CMP-2007-04160-1, "C1710", Manufacturer="AVX Interconnect / Elco", Part Number=08051C102KAT4A
C12 C13 C44: library part CMP-2007-04160-1, "C1779", Manufacturer="AVX Interconnect / Elco", Part Number=08051C102KAT4A
C16: library part CMP-2007-04160-1, "C14857", Manufacturer="AVX Interconnect / Elco", Part Number=08051C102KAT4A
C17: library part CMP-2007-04160-1, "C28323 / Put Close to Pin45", Manufacturer="AVX Interconnect / Elco", Part Number=08051C102KAT4A
C18: library part CMP-2007-04160-1, "C28323 / Put Close to Pin44", Manufacturer="AVX Interconnect / Elco", Part Number=08051C102KAT4A
C22: library part CMP-2007-04160-1, "C45783", Manufacturer="AVX Interconnect / Elco", Part Number=08051C102KAT4A
C35 C36: library part CMP-03020-027993-1, "C1647", Capacitance="18 pF", Manufacturer=KEMET, Manufacturer Part Number=C0603C180K4HACTU, Package=C0603C-CF, Temperature="-55°C to +125°C", Temperature Characteristic=X8R, Temperature Coefficient=30ppm/°C, Temperature Range High=+125°C, Temperature Range Low=-55°C, Tolerance=0.1, Voltage Rating="16 V", Automotive=Yes, Automotive Grade="Grade 1", Category=Cap, ComponentLink2Description=Datasheet, ComponentLink2URL=https://api.kemet.com/component-edge/download/datasheet/C0603C100J5GACAUTO.pdf, Device Class L1="Passive Components", Device Class L2=Capacitors, Device Class L3="Ceramic Capacitors", Height=0.87mm, Lead Free=Yes, Material=Ceramic, Octopart=https://octopart.com/c0603c180k4hactu-kemet-88725221, RoHS=TRUE
C39 C41: library part CMP-2007-04160-1, "C1740", Manufacturer="AVX Interconnect / Elco", Part Number=08051C102KAT4A
C40: library part CMP-03422-000966-1, "C1779", Capacitance="4.7 uF", Manufacturer=Yageo, Manufacturer Part Number=CC0805KKX5R9BB475, Package=CC0805-0.85, Temperature="-30°C to +85°C", Temperature Characteristic=X5R, Temperature Range High=+85°C, Temperature Range Low=-30°C, Tolerance=0.1, Voltage Rating="50 V", Automotive=No, Category=Cap, ComponentLink2Description=Datasheet, ComponentLink2URL=http://www.yageo.com/documents/recent/UPY-GPHC_Y5V_6.3V-to-50V_8.pdf, Device Class L1="Passive Components", Device Class L2=Capacitors, Device Class L3="Ceramic Capacitors", Digikey Description="CAP CER 4.7UF 50V X5R 0805", Footprint Url=http://www.yageo.com/exep/pages/download/literatures/UPY-C_GEN_24.pdf, Height=0.95mm, Ipc Land Pattern Name=CAPC200125X85, Lead Free=Yes, Material=Ceramic, Octopart=https://octopart.com/cc0805kkx5r9bb475-yageo-81932641, RoHS=TRUE
C43: library part CMP-2007-04160-1, "C28323", Manufacturer="AVX Interconnect / Elco", Part Number=08051C102KAT4A
D1: library part SMBJ9.0A, "C707989", Manufacturer_Name="HY Electronic", Datasheet Link=https://www.hygroup.com.tw/upfiles/ADUpload/all_/SMBJ%20Series%20Rev-3.pdf, Height=2.6mm, Manufacturer_Part_Number=SMBJ9.0A
D2 D3 D4 D5: library part CMP-04587-000001-1, "C10662", Breakdown Voltage=5.5V, Capacitance=10pF, Clamping Voltage=12V, Manufacturer="AVX Corporation", Manufacturer Part Number=GG040205100N2P, Package=GG0402, Peak Pulse Current=16A, Peak Pulse Power=96W, Reverse Standoff Voltage=5V, Temperature="-55°C to +125°C", Temperature Range High=+125°C, Temperature Range Low=-55°C, Automotive=No, Category=Diode, ComponentLink2Description=Datasheet, ComponentLink2URL=http://datasheets.avx.com/AVX-GiGuard.pdf, Device Class L1="Circuit Protection", Device Class L2="TVS Diodes", Device Class L3=unset, Digikey Description="TVS DIODE 5V 12V 0402", Direction=Bidirectional, Height=0.55mm, Ipc Land Pattern Name=DIOC10060X50, Lead Free=Yes, Number Of Channels=1, Octopart=https://octopart.com/gg040205100n2p-avx-81066081, RoHS=TRUE
D6: "C8678", Manufacturer_Name="HY Electronic", Datasheet Link=https://datasheet.datasheetarchive.com/originals/distributors/Datasheets-3/DSA-43252.pdf, Height=2.62mm, Manufacturer_Part_Number=SS34A
IC1: "C88224", Arrow Part Number=TB6612FNG(O,C,8,EL, Manufacturer_Name=Toshiba, Mouser Part Number=757-TB6612FNGOC8EL, Arrow Price/Stock=https://www.arrow.com/en/products/tb6612fng-oc8el/toshiba, Datasheet Link=https://componentsearchengine.com/Datasheets/1/TB6612FNG(O,C,8,EL.pdf, Height=1.6mm, Manufacturer_Part_Number=TB6612FNG(O,C,8,EL, Mouser Price/Stock=http://www.mouser.com/Search/ProductDetail.aspx?qs=VMlqFFbv3sQEQqYF0HJbow%3d%3d
IC2: library part W25Q16JVSSIQ_TR, "C131025", Arrow Part Number="W25Q16JVSSIQ TR", Manufacturer_Name=Winbond, Mouser Part Number=454-W25Q16JVSSIQTR, Arrow Price/Stock=https://www.arrow.com/en/products/w25q16jvssiqtr/winbond-electronics?utm_currency=USD&region=nac, Datasheet Link=https://www.winbond.com/resource-files/w25q16jv%20spi%20revg%2003222018%20plus.pdf, Height=2.16mm, Manufacturer_Part_Number="W25Q16JVSSIQ TR", Mouser Price/Stock=https://www.mouser.co.uk/ProductDetail/Winbond/W25Q16JVSSIQ-TR?qs=qSfuJ%252Bfl%2Fd6oXlsNm7Svfg%3D%3D
IC3: library part TPS54331D, "C9865", Manufacturer_Name="Texas Instruments", Mouser Part Number=595-TPS54331D, Arrow Part Number=TPS54331D, Arrow Price/Stock=https://www.arrow.com/en/products/tps54331d/texas-instruments?utm_currency=USD&region=europe, Datasheet Link=http://www.ti.com/lit/gpn/tps54331, Height=1.75mm, Manufacturer_Part_Number=TPS54331D, Mouser Price/Stock=https://www.mouser.co.uk/ProductDetail/Texas-Instruments/TPS54331D?qs=QyYHynRG50pEbpiybdzwkw%3D%3D
IC4: "C2934560", Manufacturer_Name="Espressif Systems", Mouser Part Number=356-ESP32C3WROOM02N4, Datasheet Link=https://www.mouser.ch/datasheet/2/891/Espressif_ESP32_C3_WROOM_02-2006871.pdf, Height=3.35mm, Manufacturer_Part_Number=ESP32-C3-WROOM-02-N4, Mouser Price/Stock=https://www.mouser.co.uk/ProductDetail/Espressif-Systems/ESP32-C3-WROOM-02-N4?qs=stqOd1AaK7%2FqjTZKEOgfUg%3D%3D
IC5: library part SY6982CQDC, "C7435940", Manufacturer_Name=Silergy, Datasheet Link=https://arvidtek.com/wp-content/uploads/2025/01/2307111037_Silergy-Corp-SY6982CQDC_C7435940.pdf, Height=0.9mm, Manufacturer_Part_Number=SY6982CQDC
J1 J2: library part KH-TYPE-C-16P, "C2765186", Package=None, Check_prices=https://www.snapeda.com/parts/KH-TYPE-C-16P/Kinghelm/view-part/?ref=eda, MF=kinghelm, MP=KH-TYPE-C-16P, SnapEDA_Link=https://www.snapeda.com/parts/KH-TYPE-C-16P/Kinghelm/view-part/?ref=snap
J5: library part B3B-XH-A_LF__SN_, "C144394", Arrow Part Number=B3B-XH-A(LF)(SN), Manufacturer_Name="JST (JAPAN SOLDERLESS TERMINALS)", Mouser Part Number=306-B3BXHALFSNP, Arrow Price/Stock=https://www.arrow.com/en/products/b3b-xh-a-lf-sn/jst-manufacturing?utm_currency=USD&region=europe, Datasheet Link=https://datasheet.lcsc.com/szlcsc/1812131720_JST-Sales-America-B3B-XH-A-LF-SN_C144394.pdf, Height=7mm, Manufacturer_Part_Number=B3B-XH-A(LF)(SN), Mouser Price/Stock=https://www.mouser.co.uk/ProductDetail/JST-Commercial/B3B-XH-ALFSN?qs=cdbOS8ANM9BVkoboCCIEMQ%3D%3D
J6: library part SC0914_13_, "C2040", Manufacturer_Name=RASPBERRY-PI, Manufacturer_Part_Number=SC0914(13), Mouser Part Number=358-SC091413, Datasheet Link=https://datasheets.raspberrypi.com/rp2040/rp2040-datasheet.pdf, Height=0.9mm, Mouser Price/Stock=https://www.mouser.co.uk/ProductDetail/Raspberry-Pi/SC091413?qs=T%252BzbugeAwjhr%252BUbBr3TJcw%3D%3D
J7 J8 J9 J11 J13 J14 J17 J19: library part 61300311121, "C52016391", Package=None, Availability=Unavailable, MP=61300311121, Price=None
J10 J16: library part CMP-1024-00357-1, "0.025\" SQ Post Header, Through-hole, Vertical, -55 to 125 degC, 2.54 mm Pitch, 4-Pin, Male, RoHS", Manufacturer=Samtec, PartNumber=TSW-104-08-G-S, Temperature Range="-55 to 125 degC", ComponentLink1Description="Manufacturer URL", ComponentLink1URL=http://www.samtec.com, ComponentLink2Description=Datasheet, ComponentLink2URL=http://www.samtec.com/documents/webfiles/pdf/TSW_TH.PDF, ComponentLink3Description="Package Specification", ComponentLink3URL=http://www.samtec.com/documents/webfiles/cpdf/TSW-XXX-XX-XXX-X-XX-XXX-MKT.pdf, DatasheetVersion=F-214, Mounting Technology=Through-hole, Orientation=Vertical, PackageDescription=".025[0.64] SQ. Post Terminal Strip Assembly", PackageReference=TSW-104-08-X-S, PackageVersion="DM, 8/1988", Pitch="2.54 mm", RoHS=True
J12 J15 J18 J20 J21 J22: "C52016391", Package=None, Availability=Unavailable, MP=61300311121, Price=None
L1: library part FXL0630-6R8-M, "C167221", Current - Saturation(Isat)=6A, Current Rating=5A, DC Resistance(DCR)=48mΩ, JLCPCB Part Class="Extended Part", LCSC Part Name="6.8uH ±20% 6A", Manufacturer=cjiang(长江微电), Tolerance=±20%, Add into BOM=yes, Convert to PCB=yes, Datasheet=https://item.szlcsc.com/datasheet/FXL0630-6R8-M/178604.html, Device=FXL0630-6R8-M, Manufacturer Part=FXL0630-6R8-M, Supplier=LCSC, Supplier Footprint=SMD,7x6.6mm, Supplier Part=C167221, Symbol=FXL0630-6R8-M, Type="Molded Inductor"
L2: library part 252012CDMCDDS-R68MC, "C492726", Current - Saturation(Isat)=6.3A, Current Rating=-, DC Resistance(DCR)=30mΩ, JLCPCB Part Class="Extended Part", LCSC Part Name="680nH ±20% 6.3A", Manufacturer=Sumida(胜美达), Tolerance=±20%, Add into BOM=yes, Convert to PCB=yes, Datasheet=https://item.szlcsc.com/datasheet/252012CDMCDDS-R68MC/503355.html, Device=252012CDMCDDS-R68MC, Manufacturer Part=252012CDMCDDS-R68MC, Ratings=-, Supplier=LCSC, Supplier Footprint=1008, Supplier Part=C492726, Symbol=252012CDMCDDS-R68MC, Type="Molded Inductor"
LED1 LED6: library part KT-0805G, "C2296", Manufacturer_Name="Hubei KENTO Elec", Datasheet Link=https://jlcpcb.com/api/file/downloadByFileSystemAccessId/8639582106239348736, Height=0.95mm, Manufacturer_Part_Number=KT-0805G
LED2 LED8: library part KT-0603R, "C2286", Manufacturer_Name="Hubei KENTO Elec", Datasheet Link=https://datasheet.lcsc.com/szlcsc/Hubei-KENTO-Elec-KT-0603R_C2286.pdf, Height=0.7mm, LCSC=C2286, Manufacturer_Part_Number=KT-0603R
LED3 LED5 LED7 LED9 LED10: library part KT-0805G, "C2297", Manufacturer_Name="Hubei KENTO Elec", Datasheet Link=https://jlcpcb.com/api/file/downloadByFileSystemAccessId/8639582106239348736, Height=0.95mm, Manufacturer_Part_Number=KT-0805G
LED4: library part KT-0805G, "C34499", Manufacturer_Name="Hubei KENTO Elec", Datasheet Link=https://jlcpcb.com/api/file/downloadByFileSystemAccessId/8639582106239348736, Height=0.95mm, Manufacturer_Part_Number=KT-0805G
Q1 Q2: library part CMP-1058-00781-1, "C20917", Manufacturer="On Semiconductor", Package Type=SOT-23-3, PartNumber=2N7002LT1G, Channel Polarity="N Channel", ComponentLink1Description="Manufacturer URL", ComponentLink1URL=http://www.onsemi.com/, ComponentLink2Description=Datasheet, ComponentLink2URL=http://www.onsemi.com/pub_link/Collateral/2N7002L-D.PDF, ComponentLink3Description="Package Specification", ComponentLink3URL=http://www.onsemi.cn/pub_link/Collateral/318-08.PDF, Configuration=Single, DatasheetVersion="Rev. 7", ID Max (A)=0.115, Mounting Technology="Surface Mount", PackageDescription="3-Pin Small Outline Transistor, Body 2.92 x 1.3 mm, Pitch 0.95 mm", PackageReference=SOT-23-3-318-08, PackageVersion="Rev. AP, 11/2009", Packing="Tape and Reel", RoHS=Pb-Free, V(BR)DSS Min (V)=60, VGS Max (V)=20, VGS(th) Max (V)=2.5
Q3 Q4 Q5: library part CMP-2000-04931-2, "C364310", Case/Package=SOT-23, Collector Base Voltage (VCBO)=60V, Collector Emitter Breakdown Voltage=40V, Collector Emitter Saturation Voltage=300mV, Continuous Collector Current=200mA, Emitter Base Voltage (VEBO)=6V, Frequency=300MHz, Max Operating Temperature=150°C, Max Power Dissipation=300mW, Min Operating Temperature=-55°C, Package Quantity=3000, Power Dissipation=350mW, Collector Emitter Voltage (VCEO)=40V, Contact Plating=Tin, Element Configuration=Single, Gain Bandwidth Product=300MHz, Height=1mm, hFE Min=100, Lead Free="Lead Free", Length=3.05mm, Max Breakdown Voltage=40V, Max Collector Current=200mA, Max Frequency=300MHz, Mount="Surface Mount", Number of Elements=1, Number of Pins=3, Packaging="Tape and Reel", Polarity=NPN, Radiation Hardening=No, REACH SVHC="No SVHC", Transition Frequency=300MHz, Voltage Rating (DC)=40V, Weight=0.000282oz, Width=1.4mm
R1 R2 R3 R4: library part CMP-04015-014497-1, "C27834"
R5 R8 R56 R63: library part CMP-26527-000104-1, "C17477", Case Code (Imperial)=0805, Case Code (Metric)=2012, Max Operating Temperature=155°C, Min Operating Temperature=-55°C, Package Quantity=1, Resistance=0mR, Case/Package=0805, Height=0.026inch, Lead Free="Lead Free", Length=0.079inch, Mount="Surface Mount", Number of Terminations=2, Packaging="Tape and Reel", Radiation Hardening=No, RoHS Compliant=Yes, Termination=Wraparound, Width=0.049inch
R6 R7: library part CMP-04015-014497-1, "C17514"
R9 R13 R22 R23 R30 R31 R32 R33 R35 R39 R41 R48 R62: library part CMP-04015-014497-1, "C17414"
R10 R12 R17 R24 R40 R59: library part CMP-04015-014497-1, "C1015"
R11 R54 R55 R58 R61 R64 R66: library part CMP-26527-002752-1, "C17888", Case Code (Imperial)=1206, Case Code (Metric)=3216, Max Operating Temperature=155°C, Min Operating Temperature=-55°C, Package Quantity=5000, Resistance=0mR, Case/Package=1206, Features="Automotive AEC-Q200", Height=0.026inch, Length=0.122inch, Mount="Surface Mount", Number of Terminations=2, Packaging="Tape and Reel", Radiation Hardening=No, RoHS Compliant=Yes, Termination=Wraparound, Width=0.061inch
R14: library part CMP-04015-014497-1, "C17629"
R15: library part CMP-04015-014497-1, "C17539"
R16: library part CMP-04015-014497-1, "C17621"
R18: library part CMP-26527-002287-1, "C25805", Case Code (Imperial)=0603, Case Code (Metric)=1608, Max Operating Temperature=155°C, Max Power Dissipation=100mW, Min Operating Temperature=-55°C, Resistance=110kR, Resistor Type="Thick Film", Temperature Coefficient=200ppm/°C, Tolerance=5%, Case/Package=0603, Contact Plating=Tin, Features="Automotive AEC-Q200", Height=0.022inch, Lead Free="Lead Free", Length=0.061inch, Mount="Surface Mount", Number of Terminations=2, Packaging="Tape and Reel", Power Rating=100mW, Radiation Hardening=No, RoHS Compliant=Yes, Series=RMCF, Size Code=0603, Width=0.031inch
R19 R26 R47 R52 R53 R57 R60 R65: library part CMP-04015-014497-1, "C17630"
R20: library part CMP-04015-014497-1, "C17801"
R21: library part CMP-04015-014497-1, "C26010"
R25: library part CMP-04015-014497-1, "C17604"
R27: library part CMP-2003-04359-2, "C49654479", Case Code (Imperial)=1206, Case Code (Metric)=3216, Max Operating Temperature=170°C, Max Power Dissipation=500mW, Min Operating Temperature=-65°C, Power Rating=250mW, Resistance=40mΩ, Temperature Coefficient=75ppm/°C, Tolerance=1%, Case/Package=1206, Composition="Metal Element", Contact Plating=Tin, Depth=1.6mm, Features="Moisture Resistant", Height=635µm, Lead Free="Lead Free", Length=3.2mm, Military Standard=Not, Mount="Surface Mount", NexarPartId=39745044, Number of Pins=1206, Number of Terminations=2, Packaging="Cut Tape", Radiation Hardening=No, REACH SVHC=Unknown, RoHS=Compliant, Schedule B="8533210045, 8533210045", Termination=SMD/SMT, Width=1.6002mm
R28: library part CMP-03412-043951-1, "C23156", Case Code (Imperial)=0603, Case Code (Metric)=1608, Max Operating Temperature=155°C, Max Power Dissipation=100mW, Min Operating Temperature=-55°C, Resistance=3MR, Resistor Type="Thick Film", Temperature Coefficient=100ppm/°C, Tolerance=1%, Voltage Rating=50V, Case/Package=0603, Features="Moisture Resistant", Height=0.022inch, Length=0.063inch, Number of Terminations=2, Packaging="Tape and Reel", Power Rating=100mW, RoHS Compliant=Yes, Series=AC, Termination=SMD/SMT, Width=0.8mm
R29 R36: library part CMP-04015-014497-1, "C17634"
R34 R38 R43: library part CMP-04015-014497-1, "C149504"
R37: library part CMP-04015-014497-1, "C17408"
R42: library part CMP-04015-014497-1, "C17709"
R44: library part CMP-04015-014497-1, "C17590"
R45: library part CMP-04015-014497-1, "C17471"
R46: library part CMP-04015-014497-1, "C17437"
R49 R50: library part CMP-04015-014497-1, "C17673"
R51: library part CMP-04015-014497-1, "C4328"
RNTC1: library part CMP-06022-000440-1, "C338605", Case Code (Imperial)=0805, Case Code (Metric)=2012, Current Rating=100uA, Max Operating Temperature=125°C, Max Power Dissipation=200mW, Min Operating Temperature=-40°C, Package Quantity=4000, Resistance=100kR, Tolerance=5%, Accuracy=3%, Case/Package=0805, Depth=1.25mm, Height=0.85mm, Lead Free="Lead Free", Length=2mm, Mount="Surface Mount", Number of Pins=2, Packaging="Tape and Reel", Power Rating=200mW, Radiation Hardening=No, REACH SVHC="No SVHC", Termination=SMD/SMT, Width=1.25mm
RT1: "THERMISTOR NTC 10KOHM 3380K BEAD", Package="RADIAL-2 Murata", Availability=Good, Check_prices=https://www.snapeda.com/parts/NXRT15XH103FA1B030/Murata/view-part/4970536/?ref=eda, MF=Murata, MP=NXRT15XH103FA1B030, Price=None, Purchase-URL=https://pricing.snapeda.com/search/part/NXRT15XH103FA1B030/?ref=eda, SnapEDA_Link=https://www.snapeda.com/parts/NXRT15XH103FA1B030/Murata/view-part/4970536/?ref=snap
S1 S2 S3 S4: library part TS-1088-AR02016, "C720477", Manufacturer_Name=XUNPU, Datasheet Link=https://www.xunpudianzi.com/uploads/pdf/TS-1088-ARXXX.pdf, Height=2mm, Manufacturer_Part_Number=TS-1088-AR02016
SW1 SW2: library part SS-22F32-G060, "C2848931", Actuator Color=Black, Current Rating=1A, JLCPCB Part Class="Extended Part", LCSC Part Name="柄长6mm 直插两档 滑动开关", Manufacturer=G-Switch(品赞), Operating Temperature=-25℃~+70℃, Voltage Rating=24V, Actuator Style="Rectangular Columnar", Add into BOM=yes, Circuit=DPDT, Convert to PCB=yes, Datasheet=https://item.szlcsc.com/datasheet/SS-22F32-G060/3048280.html, Device=SS-22F32-G060, Length=23.2mm, Life="10,000 Cycles", Manufacturer Part=SS-22F32-G060, Mounting Type="Through Hole", Supplier=LCSC, Supplier Footprint=插件,23.2x7.5mm, Supplier Part=C2848931, Switch Height=13mm, Symbol=SS-22F32-G060, Termination Style="PC Pin", Width=7.5mm
U1: library part CM1022-CA, "C22446437", Battery Temperature Detection=Support, Charging Saturation Voltage=4.25V, End-Off Voltage=2.5V, JLCPCB Part Class="Extended Part", LCSC Part Name=2节,带温度保护, Manufacturer=iCM(创芯微), Operating Temperature=-40℃~+85℃, Supply Current (Iq)=5uA, Add into BOM=yes, Convert to PCB=yes, Datasheet=https://item.szlcsc.com/datasheet/CM1022-CA/24098222.html, Device=CM1022-CA, Manufacturer Part=CM1022-CA, Number of Cells=2, Supplier=LCSC, Supplier Footprint=MSOP-10, Supplier Part=C22446437, Symbol=CM1022-CA, The Chip Type="Protection IC", Type of Battery=Lithium-ion/Polymer
U2: library part BQ29209DRBR, "C139352", Package="VSON-8 Texas Instruments", Check_prices=https://www.snapeda.com/parts/BQ29209DRBR/Texas+Instruments/view-part/?ref=eda, MF="Texas Instruments", MP=BQ29209DRBR, SnapEDA_Link=https://www.snapeda.com/parts/BQ29209DRBR/Texas+Instruments/view-part/?ref=snap
Y1: library part ABM8-272-T3, "C20625731", Manufacturer_Name=ABRACON, Mouser Part Number=815-ABM8-272-T3, Datasheet Link=https://abracon.com/datasheets/ABM8-272-T3.pdf, Height=0.8mm, Manufacturer_Part_Number=ABM8-272-T3, Mouser Price/Stock=https://www.mouser.co.uk/ProductDetail/ABRACON/ABM8-272-T3?qs=QpmGXVUTftEj6miOiJBMxQ%3D%3D

## Free pads (board coordinates)
  round 314.96 hole 125.98 unplated: 1(161.48,570) 1(161.48,3440) 1(3760,570) 1(3761,3442)

## Via types
v1: diameter 18, hole 12, Top Layer to Bottom Layer, 108 vias
v2: diameter 24, hole 12, Top Layer to Bottom Layer, 56 vias

## Nets (pads, with @x,y where several pads share a name; then routed paths per layer and width w, separated by ;. In a path a pad name is that pad's centre, name@x,y a point inside that pad or via, vN(x,y) a via of type N, cw(c..) or ccw(c..) an arc to the next point about the centre after c; other vN are vias at no path point)
1V1: C17.1 C19.1 C20.1 J6.23 J6.45 J6.50 | length 1400.8
  Top Layer w8: C19.1@2013,3142.46 2044,3111.46 2044,3097 2161.13,2979.87 J6.50@2161.13,2924.35 2161.06,2924.29 2161.06,2895.06 2150.91,2884.91 2137.43,2884.91 2118.52,2866 ; v1(2080,2866) 2118.52,2866 ; J6.23@2192.62,2653.65 2192.62,2605.44 C20.1@2270,2528.06 ; J6.45@2239.8,2911.13 2236.56,2907.88 2236.56,2903.61 2198.95,2866 2118.52,2866 ; J6.45@2239.87,2924.35 J6.45@2239.87,2924.35 2239.93,2963.93 2297.41,3021.41 C17.1@2297.41,3061.55 ; C20.1@2273,2530.54 2291.64,2511.91 2302.39,2511.91 2317.38,2496.91 2322.09,2496.91 v1(2324,2495)
  Bottom Layer w8: v1(2080,2866) 2080,2739 v1(2324,2495)
+3V3: C3.1 C6.1 C9.2 C10.2 C18.1 C22.1 C23.1 C24.1 C25.1 C26.1 C27.1 C28.1 C29.1 C33.1 C34.1 IC1.20 IC2.8 IC4.1 J6.1 J6.10 J6.22 J6.33 J6.42 J6.43 J6.44 J6.48 J6.49 J7.1 J7.2 J7.3 J10.3 L1.2 R9.1 R11.1 R19.2 R31.1 R32.2 R33.1 R35.1 R39.1 R49.1 R50.1 R54.2 R55.2 R58.2 R61.2 R64.2 R66.2 | length 15728.5
  Top Layer w8: 1358,2842 1369,2853 1737.21,2853 1749.36,2865.15 1749.36,2869.43 1761.94,2882 1766,2882 1766,2890.94 1786.64,2911.57 1868.51,2911.57 1874.94,2918 1994,2918 2020.42,2891.58 2020.42,2891.43 2020.48,2891.36 J6.1@2033.65,2891.36 ; 1671,2382.64 2024.64,2029 2531,2029 2550,2048 2550,2145.67 2537.16,2158.5 R35.1@2537,2158.5 ; 1702.68,2414.32 1683,2434 1683,2653.05 1762.49,2732.54 C25.1@1870,2732.54 1887.09,2749.63 J6.10@2033.65,2749.63 ; C33.1@2087,3140.46 2089.36,3140.46 2108,3121.82 v1(2108,3088) 2108,3060 2176.81,2991.19 J6.49@2176.81,2937.58 ; C34.1@2162.5,3130.96 2154.14,3130.96 2144,3120.82 v1(2144,3078) 2145.91,3076.09 2145.91,3057.09 2192.56,3010.44 J6.48@2192.62,2924.35 J6.48@2192.62,2924.35 ; C26.1@2185.36,2509.91 C26.1@2204,2528.54 2190,2542.54 2190,2571 2176.87,2584.13 J6.22@2176.87,2653.65 2176.94,2653.71 2176.94,2677.94 2186,2687 2263,2687 2275,2699 2275,2744.94 2279.69,2749.63 J6.33@2304.35,2749.63 2395.83,2749.63 2398.46,2747 C27.1@2429,2747 ; J6.42@2304.35,2891.36 2368.82,2891.36 2396.46,2919 C28.1@2444,2919 2460.59,2935.59 2460.59,2952.59 2538,3030 2538,3060 2536.91,3061.09 2536.91,3071.09 v1(2535,3073) ; C18.1@2382.78,3057.46 2367.14,3041.82 2367.14,3032.14 2303.9,2968.9 2287,2968.9 2255.61,2937.52 J6.44@2255.61,2924.35 J6.43@2271.36,2924.35 2271.36,2930.64 2271.43,2930.7 2277.71,2930.7 2286.01,2939 2333,2939 2432,3038 C29.1@2485.32,3038 ; C27.1@2440.46,2734 2440.46,2730.06 2465.73,2704.79 2465.73,2704.58 2471.38,2698.93 2548.93,2698.93 v1(2570,2720)
  Top Layer w10: 3232.91,3280 3263.2,3249.71 3263.2,3124.8 3288.3,3099.7 3288.3,2784.33 3300.14,2772.5 R32.2@3310,2772.5
  Top Layer w15: IC1.20@1288.61,1973.24 1288.61,2214.61 1563,2489 ; 1671,2381 1671,2382.64 1702.68,2414.32 1779.5,2491.14 R49.1@1779.5,2501 ; R49.1@1784.43,2496.07 1784.43,2486.21 1788.83,2481.8 1798.7,2481.8 1806.83,2473.66 1867.83,2473.66 1877.17,2464.33 R50.1@1877.17,2460.33 ; C18.1@2382.78,3057.46 2384.24,3056 2479,3056 2493.59,3070.59 2531.78,3070.59 2534.19,3073 v1(2535,3073) ; J10.3@2600,800 2650,850 2650,1080.83 2729.7,1160.53 2729.7,1199.7 J7.1@2880,1350 J7.2@2880,1450 J7.3@2880,1550 ; v2@2969.28,1804.28 v2(2971,1806)
  Top Layer w20: R11.1@1230,3049.06 1255.43,3023.62 1304.38,3023.62 1358,2970 1358,2842 1358,2694 1563,2489 1671,2381 ; IC2.8@1616,3417.32 1616,3470 1674,3528 1897,3528 1912,3513 v1(1912,3374.76) ; J7.3@2880,1550 2880,1762 2922.28,1804.28 v2@2969.28,1804.28 ; v1(3027,1938) 3027,3064 v1(3018,3073) 3018,3173.36 3058.14,3213.5 R39.1@3068,3213.5 3077.86,3213.5 3144.36,3280 3232.91,3280 3654,3280 3816.22,3117.78 3816.22,2742.02 C22.1@3822.5,2735.74 3743.28,2735.74 3736.45,2742.58 R33.1@3736.45,2750
  Top Layer w25: v1(3027,1938) 3046.16,1957.16 3085.66,1957.16 R31.1@3090,1961.5
  Top Layer w30: 1227,3272 1232.5,3277.5 1453.5,3277.5 ; R9.1@1477.34,3146.37 1477.34,3277.5 ; C6.1@1538,3405.54 1545.64,3413.18 1563.01,3413.18 1567.15,3417.32 IC2.8@1616,3417.32 ; C6.1@1538,3413.18 1538,3410.56 1526.43,3398.98 1491.71,3398.98 1453.5,3360.78 1453.5,3324.5 ; J7.1@2880,1350 2880,1208.9 2933.11,1155.79 R54.2@2933.11,1155 2938.58,1149.53 2938.58,620.47 R64.2@2944.06,615 R66.2@2944.06,485 ; IC4.1@3670.79,2498.98 3672.82,2501.01 3672.82,2551.11 3691.72,2570 3723.25,2570 3761.18,2607.93 3761.18,2620.85 3778.75,2638.43 3793.82,2638.43 3801.46,2646.06 C23.1@3801.46,2650 3809.09,2657.64 3809.09,2718.4 3822.5,2731.81 C22.1@3822.5,2735.74 ; 1453.5,3277.5 1453.5,3324.5 ; 1453.5,3277.5 1464.57,3288.57 1464.57,3313.43 1453.5,3324.5
  Bottom Layer w8: v1(2535,3073) 2570,3038 v1(2570,2720)
  Bottom Layer w20: v1(2108,3088) 2111.5,3091.5 2111.5,3390.72 2144.12,3423.34 2443.66,3423.34 2465,3402 2465,3143 v1(2535,3073)
  Bottom Layer w25: v1(1912,3374.76) 1976,3310.76 1976,3220 v1(2108,3088) 2134,3088 v1(2144,3078) ; v1(2535,3073) v1(3018,3073) ; v2(2971,1806) 3027,1862 v1(3027,1938)
+5_Charging: C43.1 C44.1 IC5.16 L2.2 R38.2 R59.2 R62.2 R63.1 SW1.4 SW2.5 | length 2131.6
  Top Layer w15: 373.5,2088.5 416,2131 784.43,2131 856.24,2059.2 894.17,2059.2 903.5,2049.86 R62.2@903.5,2040 903.5,1977.29 960,1920.79 R63.1@960,1920
  Top Layer w30: L2.2@409.45,1879.61 399.52,1869.68 399.52,1809.52 260,1670 199.53,1670 153.74,1624.21 148.29,1624.21 135,1610.92 135,1564.41 184.41,1515 370,1515 445,1590 R38.2@497.5,1590 ; L2.2@409.52,1850 418.14,1858.62 418.14,1879.21 418.54,1879.61 C43.1@418.54,1943.94
  Top Layer w40: R59.2@361,2039 385.3,2014.7 385.61,2014.7 420,1980.32 420,1980 ; R59.2@361,2054 361,2231.64 435.02,2305.66 435.02,2329.29 438.37,2332.64 SW1.4@462,2332.64
+5_preswitch: J1.A4_B9 J1.A9_B4 J2.A4_B9 J2.A9_B4 SW2.4 | length 7863.2
  Top Layer w17: J2.A9_B4@2109.2,3342.93 2109.2,3350 2110.5,3351.3 2110.5,3565 ; 2267,3565 2267,3388 2283.5,3371.5 2283.5,3353 2290.57,3345.93 ; J1.A4_B9@3648.68,1459.29 3651.99,1462.6 3669.4,1462.6 3672.77,1465.98 3676.7,1465.98 3678.19,1467.47 3710.47,1467.47 3750,1507 3750,1600.51 3719.51,1631 3689.69,1631 3671.69,1649 J1.A9_B4@3664,1649
  Top Layer w25: 2267,3565 2777.44,3565 2963,3379.44 2963,1887 3245,1605 3245,1480 3375,1350 3536,1350 3609.04,1423.04 3609.04,1446.65 3619,1456.61 3628.25,1456.61 3630.24,1458.6 J1.A4_B9@3638.54,1458.6
  Top Layer w30: SW2.4@135,1747.48 135,1768.4 127.03,1776.37 106.11,1776.37 40,1842.48 40,3056.57 40,3069 57.57,3086.57 286.57,3314.1 ccw(c161.48,3440) 287.35,3314.87 542.47,3570 2099,3570 ; 2110.5,3565 2267,3565
A01: IC1.1 IC1.2 J12.2 | length 1195.5
  Top Layer w30: 1191.85,1647.15 1232.59,1606.41 1248.37,1606.41 1281.41,1573.37 1281.41,1184.59 1363,1103 1363,704 1453.08,613.92 1486.08,613.92 J12.2@1494.47,605.53
A02: IC1.5 IC1.6 J12.3 | length 1058.9
  Top Layer w30: 1302.5,1670.5 1302.5,1631.67 1315.91,1618.26 1315.91,1514.07 1347,1482.98 1347,1227 1423,1151 1423,761 1458.55,725.45 1462.69,725.45 J12.3@1494.54,693.6
B01: IC1.11 IC1.12 J18.3 | length 368.2
  Top Layer w30: 1448,1648.76 1448,1636 1441,1629 1441,1357.6 1476.02,1322.59 J18.3@1476.02,1297.93
B02: IC1.7 IC1.8 J18.2 | length 529.8
  Top Layer w30: IC1.8@1359,1664.21 1359,1538 1398,1499 1398,1285 1463.58,1219.42 1468.72,1219.42 J18.2@1494.58,1193.56
Bat+: C1.2 C2.1 D1.1 IC1.13 IC1.14 IC1.24 IC5.12 SW1.6 SW2.2 | length 2312.7
  Top Layer w20: C1.2@1153,2108.64 1157.44,2108.64 1175,2091.08 1175,2010.84 1185.11,2000.73 1185.11,1974.38 IC1.24@1186.25,1973.24 1186.25,1846